# EAGLE board electrosteel2020_10_arrange6_ethernetonl (EAGLE 9.6.2), part 1 of 2
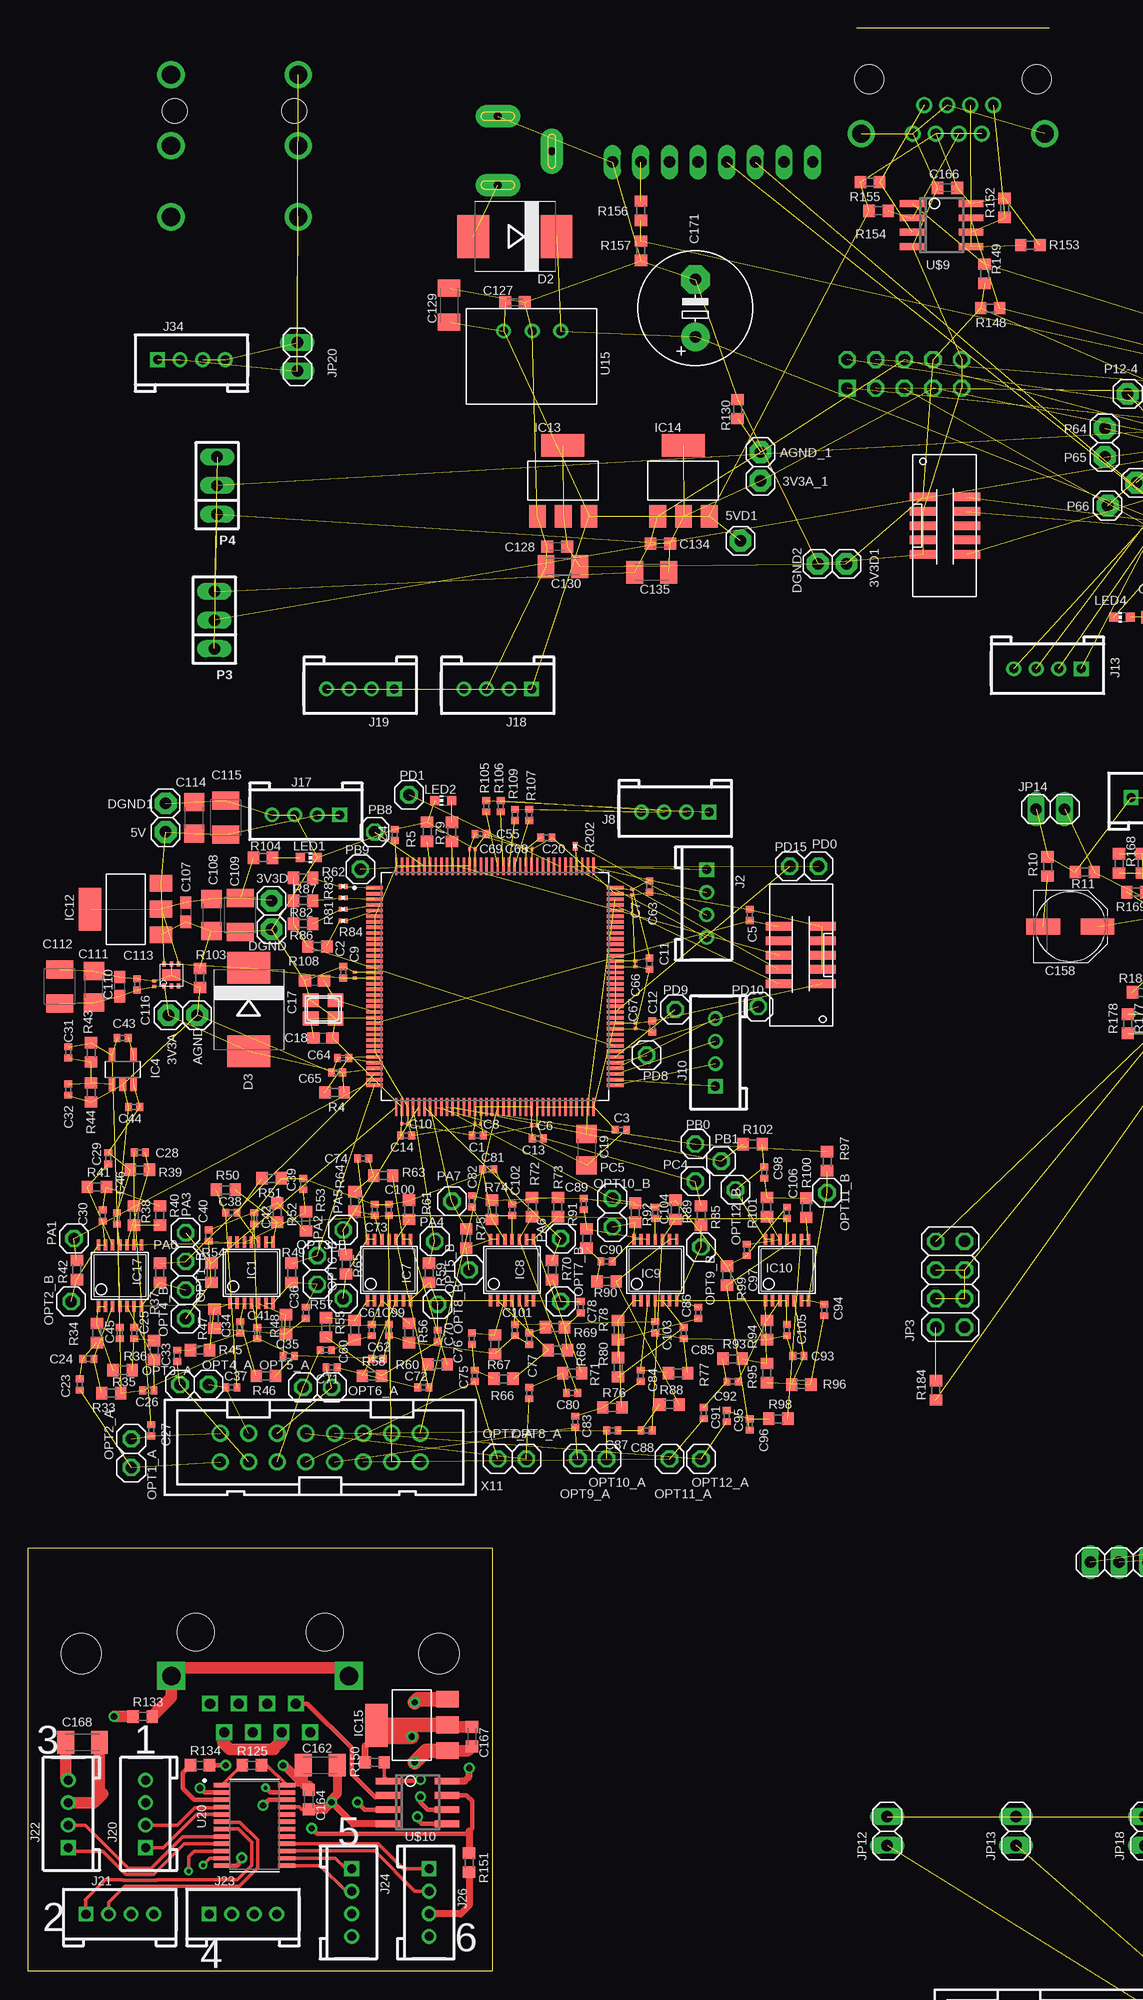
[diagram p0: board, top side]
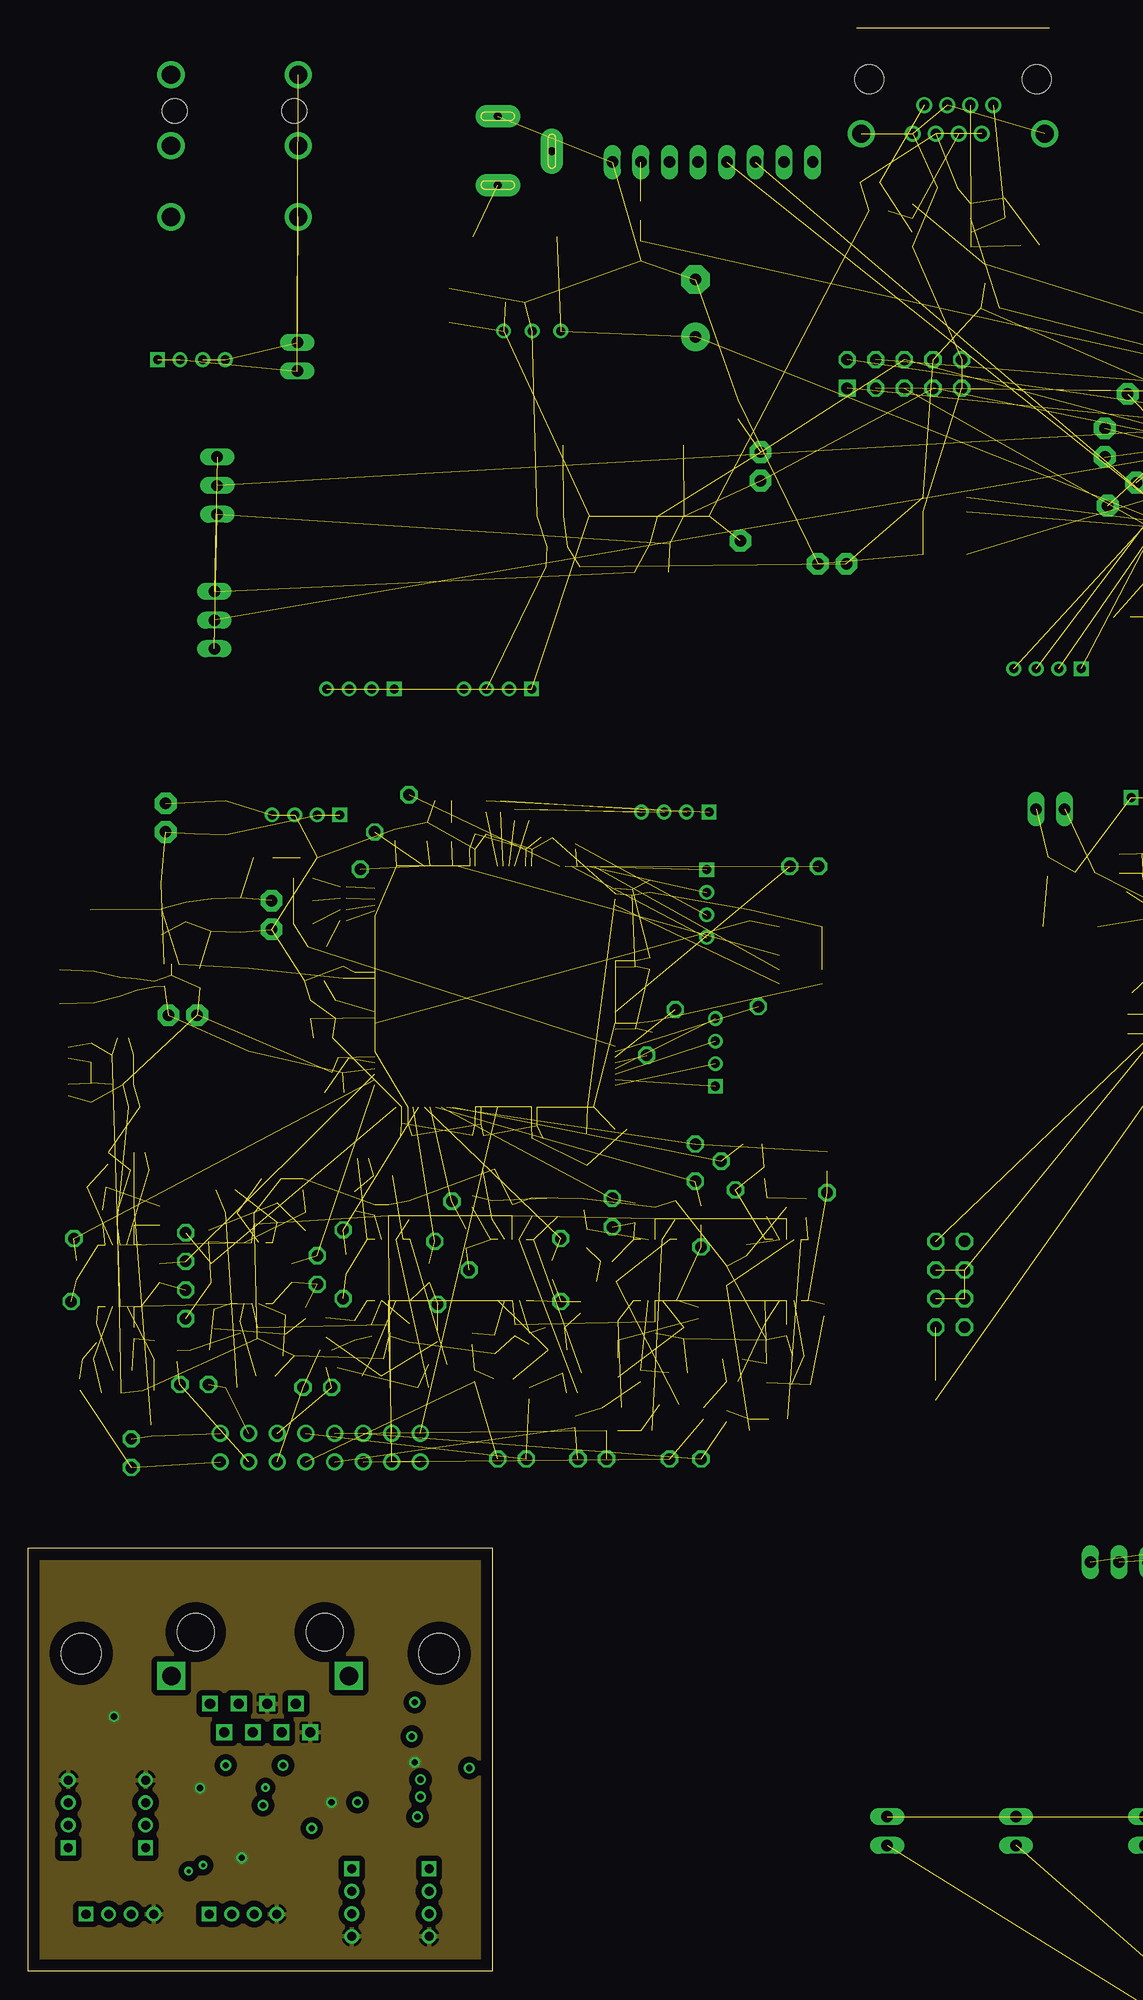
[diagram p1: board, inner layer Route2]
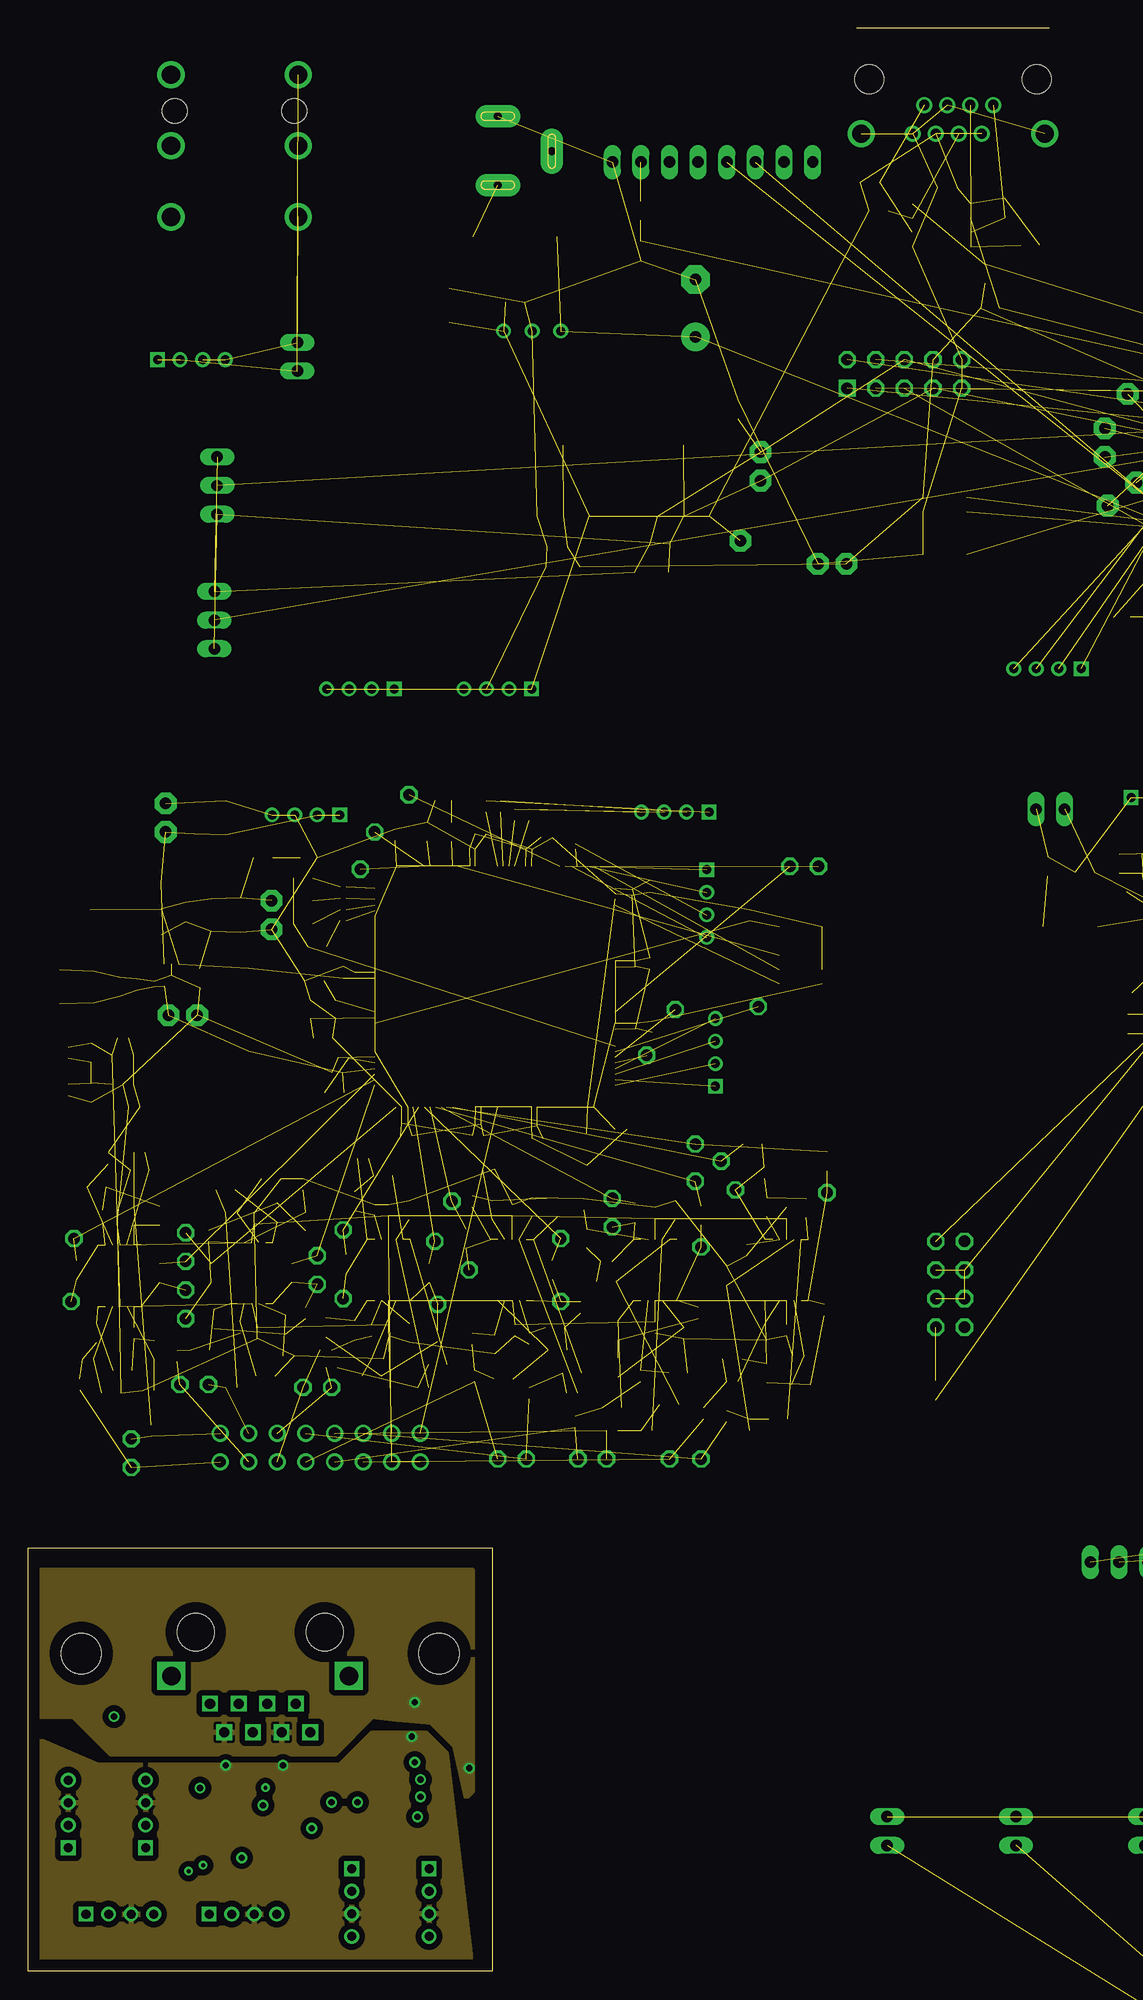
[diagram p2: board, inner layer Route15]
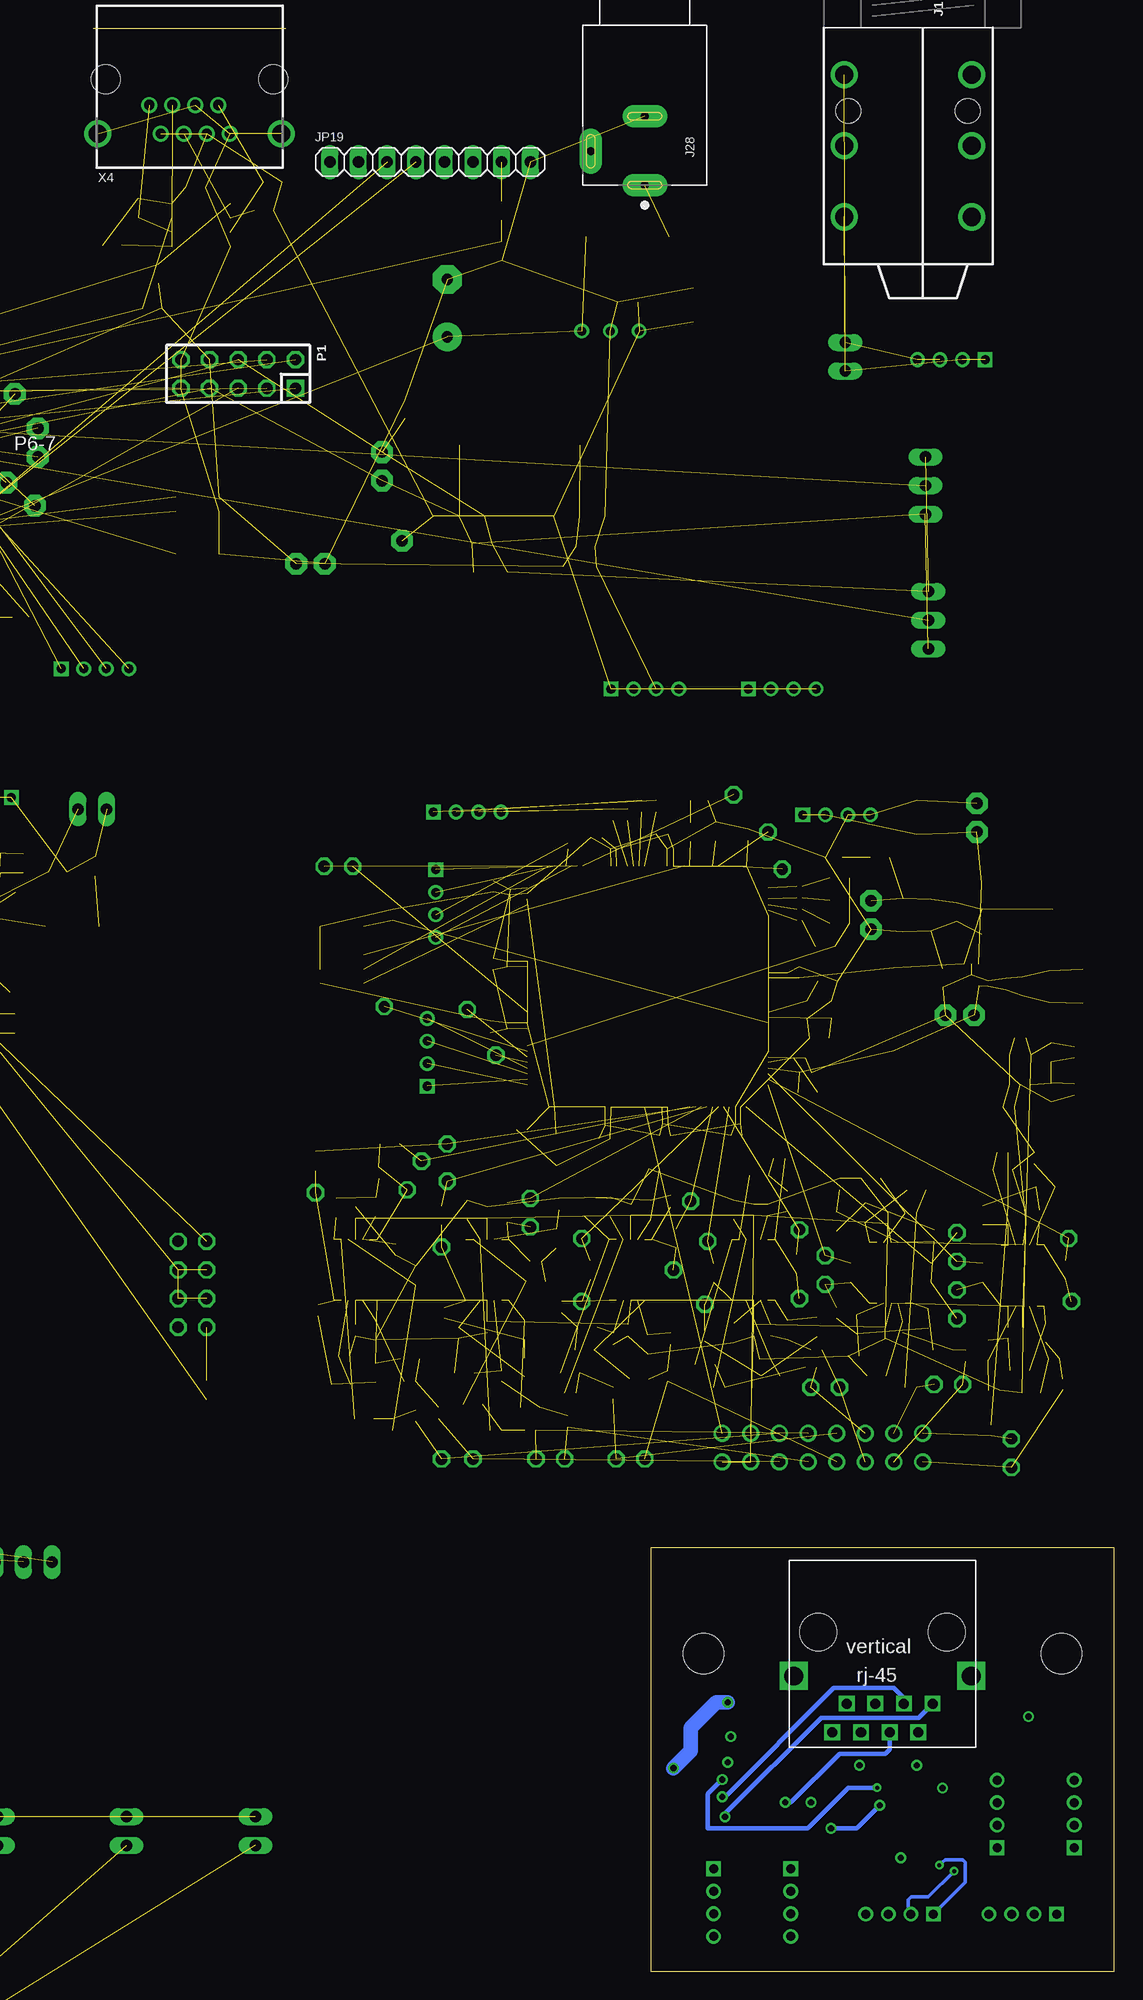
[diagram p3: board, bottom side, seen from below]

Size 41.15 x 37.59 mm. Coordinates in mm from the lower left corner, seen from the top.
Outline: 0,37.59 41.15,37.59 41.15,0 0,0 0,37.59
Copper layers (1+2*15+16): Top 0.035mm / dielectric 0.5mm / Route2 0.035mm / dielectric 0.5mm / Route15 0.035mm / dielectric 0.5mm / Bottom 0.035mm
Design rules "default *": minimum track width 6mil, minimum drill 0.35mm, track to track 9mil, track to pad 9mil, pad to pad 9mil, via to via 9mil, smd to smd 9mil, copper to edge 40mil, drill to drill 6mil, minimum pad ring 10mil, minimum via ring 8mil, stop-mask expansion 4mil, vias tented up to drill 0mil, thermal gap 10mil
Holes 3.56 mm at 4.7,28.19 36.45,28.19
Milling: 4 lines

## Footprints (pad centres in the part's own frame; a part is rotated, then mirrored left to right if it is on the bottom)
1X01 = drill 1.016 pad 1.93 octagon: 1 0,0
1X01' = drill 1.016 octagon: 1 0,0
0402 = smd 0.6 x 0.7: 1 -0.5,0; 2 0.5,0
C0201 = smd 0.25 x 0.35: 1 -0.25,0; 2 0.25,0
C0603 = smd 1.1 x 1: 1 -0.85,0; 2 0.85,0
C1206 = smd 1.6 x 1.8: 1 -1.4,0; 2 1.4,0
SMC_B = smd 1.6 x 2.4: + -1.5,0; - 1.5,0
C0603K = smd 1.05 x 1.08: 1 -0.875,0; 2 0.875,0
C1206K = smd 1.5 x 2: 1 -1.5,0; 2 1.5,0
PANASONIC_D = smd 3 x 1.4: + 2.4,0; - -2.4,0
E5-10,5 = drill 1.016 pad 2.54: + -2.54,0 | drill 1.016 pad 2.54 octagon: - 2.54,0
SMC = smd 2.8 x 3.8: A 3.7,0; C -3.7,0
TSSOP14 = smd 0.305 x 0.991: 1 -1.905,-2.718; 2 -1.27,-2.718; 3 -0.635,-2.718; 4 0,-2.718; 5 0.635,-2.718; 6 1.27,-2.718; 7 1.905,-2.718; 8 1.905,2.718; 9 1.27,2.718; 10 0.635,2.718; 11 0,2.718; 12 -0.635,2.718; 13 -1.27,2.718; 14 -1.905,2.718
SOT23-5 = smd 0.6 x 1.2: 1 -0.95,-1.306; 2 0,-1.306; 3 0.95,-1.306; 4 0.95,1.306; 5 -0.95,1.306
QFP50P2200X2200X160-144N = smd 1.56 x 0.28: 1 -10.68,8.75; 2 -10.68,8.25; 3 -10.68,7.75; 4 -10.68,7.25; 5 -10.68,6.75; 6 -10.68,6.25; 7 -10.68,5.75; 8 -10.68,5.25; 9 -10.68,4.75; 10 -10.68,4.25; 11 -10.68,3.75; 12 -10.68,3.25; 13 -10.68,2.75; 14 -10.68,2.25; 15 -10.68,1.75; 16 -10.68,1.25; 17 -10.68,0.75; 18 -10.68,0.25; 19 -10.68,-0.25; 20 -10.68,-0.75; 21 -10.68,-1.25; 22 -10.68,-1.75; 23 -10.68,-2.25; 24 -10.68,-2.75; 25 -10.68,-3.25; 26 -10.68,-3.75; 27 -10.68,-4.25; 28 -10.68,-4.75; 29 -10.68,-5.25; 30 -10.68,-5.75; 31 -10.68,-6.25; 32 -10.68,-6.75; 33 -10.68,-7.25; 34 -10.68,-7.75; 35 -10.68,-8.25; 36 -10.68,-8.75; 73 10.68,-8.75; 74 10.68,-8.25; 75 10.68,-7.75; 76 10.68,-7.25; 77 10.68,-6.75; 78 10.68,-6.25; 79 10.68,-5.75; 80 10.68,-5.25; 81 10.68,-4.75; 82 10.68,-4.25; 83 10.68,-3.75; 84 10.68,-3.25; 85 10.68,-2.75; 86 10.68,-2.25; 87 10.68,-1.75; 88 10.68,-1.25; 89 10.68,-0.75; 90 10.68,-0.25; 91 10.68,0.25; 92 10.68,0.75; 93 10.68,1.25; 94 10.68,1.75; 95 10.68,2.25; 96 10.68,2.75; 97 10.68,3.25; 98 10.68,3.75; 99 10.68,4.25; 100 10.68,4.75; 101 10.68,5.25; 102 10.68,5.75; 103 10.68,6.25; 104 10.68,6.75; 105 10.68,7.25; 106 10.68,7.75; 107 10.68,8.25; 108 10.68,8.75 | smd 0.28 x 1.56: 37 -8.75,-10.68; 38 -8.25,-10.68; 39 -7.75,-10.68; 40 -7.25,-10.68; 41 -6.75,-10.68; 42 -6.25,-10.68; 43 -5.75,-10.68; 44 -5.25,-10.68; 45 -4.75,-10.68; 46 -4.25,-10.68; 47 -3.75,-10.68; 48 -3.25,-10.68; 49 -2.75,-10.68; 50 -2.25,-10.68; 51 -1.75,-10.68; 52 -1.25,-10.68; 53 -0.75,-10.68; 54 -0.25,-10.68; 55 0.25,-10.68; 56 0.75,-10.68; 57 1.25,-10.68; 58 1.75,-10.68; 59 2.25,-10.68; 60 2.75,-10.68; 61 3.25,-10.68; 62 3.75,-10.68; 63 4.25,-10.68; 64 4.75,-10.68; 65 5.25,-10.68; 66 5.75,-10.68; 67 6.25,-10.68; 68 6.75,-10.68; 69 7.25,-10.68; 70 7.75,-10.68; 71 8.25,-10.68; 72 8.75,-10.68; 109 8.75,10.68; 110 8.25,10.68; 111 7.75,10.68; 112 7.25,10.68; 113 6.75,10.68; 114 6.25,10.68; 115 5.75,10.68; 116 5.25,10.68; 117 4.75,10.68; 118 4.25,10.68; 119 3.75,10.68; 120 3.25,10.68; 121 2.75,10.68; 122 2.25,10.68; 123 1.75,10.68; 124 1.25,10.68; 125 0.75,10.68; 126 0.25,10.68; 127 -0.25,10.68; 128 -0.75,10.68; 129 -1.25,10.68; 130 -1.75,10.68; 131 -2.25,10.68; 132 -2.75,10.68; 133 -3.25,10.68; 134 -3.75,10.68; 135 -4.25,10.68; 136 -4.75,10.68; 137 -5.25,10.68; 138 -5.75,10.68; 139 -6.25,10.68; 140 -6.75,10.68; 141 -7.25,10.68; 142 -7.75,10.68; 143 -8.25,10.68; 144 -8.75,10.68
78LXX = drill 0.813 octagon: GND 0,1.905; IN 1.27,0; OUT -1.27,0
79LXX = drill 0.813 octagon: GND -1.27,0; IN 0,1.905; OUT 1.27,0
6-WSON = smd 0.45 x 0.3: 1 -0.975,0.65; 2 -0.975,0; 3 -0.975,-0.65; 4 0.975,-0.65; 5 0.975,0; 6 0.975,0.65 | smd 0.9 x 1.6: PAD 0,0
SOT223 = smd 1.499 x 2.007: 1 -2.261,-3.15; 2 0.025,-3.15; 3 2.311,-3.15 | smd 3.81 x 2.007: PAD 0,3.15
AUDIO_JACK_0.25"_TRS_PTH_RA = drill 1.6: RING 10.5,-6.95; RING-NORM 10.5,4.35; SLEEVE 4.2,-6.95; SLEEVE-NORM 4.2,4.35; TIP 16.8,-6.95; TIP-NORM 16.8,4.35 | hole 2.2: 7.4,4; 7.4,-6.6
HW4-2.0 = drill 0.8 pad 1.27 square: 1 -3,0 | drill 0.8 pad 1.27: 2 -1,0; 3 1,0; 4 3,0
HW4-2.0-90D = drill 0.8 pad 1.27 square: 1 -3,0 | drill 0.8 pad 1.27: 2 -1,0; 3 1,0; 4 3,0
CUI_PJ-066A = drill 0.7 pad 2 long: 1 0,0; 2 6.1,0; 3 3,4.8
DIL-100-2X10_M = drill 1.016 square: 1 -11.43,1.27 | drill 1.016 octagon: 2 -11.43,-1.27; 3 -8.89,1.27; 4 -8.89,-1.27; 5 -6.35,1.27; 6 -6.35,-1.27; 7 -3.81,1.27; 8 -3.81,-1.27; 9 -1.27,1.27; 10 -1.27,-1.27; 11 1.27,1.27; 12 1.27,-1.27; 13 3.81,1.27; 14 3.81,-1.27; 15 6.35,1.27; 16 6.35,-1.27; 17 8.89,1.27; 18 8.89,-1.27; 19 11.43,1.27; 20 11.43,-1.27
1X04 = drill 1.016 long: 1 -3.81,0; 2 -1.27,0; 3 1.27,0; 4 3.81,0
2X04 = drill 1.016 octagon: 1 -3.81,-1.27; 2 -3.81,1.27; 3 -1.27,-1.27; 4 -1.27,1.27; 5 1.27,-1.27; 6 1.27,1.27; 7 3.81,-1.27; 8 3.81,1.27
2X10 = drill 1.016 octagon: 1 -11.43,-1.27; 2 -11.43,1.27; 3 -8.89,-1.27; 4 -8.89,1.27; 5 -6.35,-1.27; 6 -6.35,1.27; 7 -3.81,-1.27; 8 -3.81,1.27; 9 -1.27,-1.27; 10 -1.27,1.27; 11 1.27,-1.27; 12 1.27,1.27; 13 3.81,-1.27; 14 3.81,1.27; 15 6.35,-1.27; 16 6.35,1.27; 17 8.89,-1.27; 18 8.89,1.27; 19 11.43,-1.27; 20 11.43,1.27
2X15 = drill 1.016 octagon: 1 -17.78,-1.27; 2 -17.78,1.27; 3 -15.24,-1.27; 4 -15.24,1.27; 5 -12.7,-1.27; 6 -12.7,1.27; 7 -10.16,-1.27; 8 -10.16,1.27; 9 -7.62,-1.27; 10 -7.62,1.27; 11 -5.08,-1.27; 12 -5.08,1.27; 13 -2.54,-1.27; 14 -2.54,1.27; 15 0,-1.27; 16 0,1.27; 17 2.54,-1.27; 18 2.54,1.27; 19 5.08,-1.27; 20 5.08,1.27; 21 7.62,-1.27; 22 7.62,1.27; 23 10.16,-1.27; 24 10.16,1.27; 25 12.7,-1.27; 26 12.7,1.27; 27 15.24,-1.27; 28 15.24,1.27; 29 17.78,-1.27; 30 17.78,1.27
1X02 = drill 1.016 long: 1 -1.27,0; 2 1.27,0
1X08 = drill 1.016 long: 1 -8.89,0; 2 -6.35,0; 3 -3.81,0; 4 -1.27,0; 5 1.27,0; 6 3.81,0; 7 6.35,0; 8 8.89,0
CHIP-LED0603 = smd 0.8 x 0.8: A 0,-0.75; C 0,0.75
P-LCC-2 = smd 4 x 4: A 0,2.75; C 0,-2.75
DIL-100-2X05_M = drill 1.016 square: 1 -5.08,1.27 | drill 1.016 octagon: 2 -5.08,-1.27; 3 -2.54,1.27; 4 -2.54,-1.27; 5 0,1.27; 6 0,-1.27; 7 2.54,1.27; 8 2.54,-1.27; 9 5.08,1.27; 10 5.08,-1.27
DIL-100-2X12_M = drill 1.016 square: 1 -13.97,1.27 | drill 1.016 octagon: 2 -13.97,-1.27; 3 -11.43,1.27; 4 -11.43,-1.27; 5 -8.89,1.27; 6 -8.89,-1.27; 7 -6.35,1.27; 8 -6.35,-1.27; 9 -3.81,1.27; 10 -3.81,-1.27; 11 -1.27,1.27; 12 -1.27,-1.27; 13 1.27,1.27; 14 1.27,-1.27; 15 3.81,1.27; 16 3.81,-1.27; 17 6.35,1.27; 18 6.35,-1.27; 19 8.89,1.27; 20 8.89,-1.27; 21 11.43,1.27; 22 11.43,-1.27; 23 13.97,1.27; 24 13.97,-1.27
SIP-100-03-40Y = drill 1.016 long: 1 -2.54,0; 2 0,0; 3 2.54,0
NX3225 = smd 1.4 x 1.2: 1 -1.1,-0.8; 2 1.1,-0.8; 3 1.1,0.8; 4 -1.1,0.8
RESC1608X60 = smd 0.799 x 0.974: 1 -0.815,0; 2 0.815,0
R0603 = smd 1 x 1.1: 1 -0.85,0; 2 0.85,0
R0201 = smd 0.28 x 0.43: 1 -0.255,0; 2 0.255,0
TACTILE_SWITCH_PTH_6.0MM = drill 1.016 pad 1.88: 1 -3.251,2.261; 2 3.251,2.261; 3 -3.251,-2.261; 4 3.251,-2.261
PEC11R-4215F-S0024 = drill 1 square: 1 -2.5,7 | drill 1: 2 2.5,7; A -2.5,-7.5; B 2.5,-7.5; C 0,-7.5 | drill 1.8 long: P1 -5.7,0; P2 5.7,0
TQFP-100-14X14MM = smd 1.5 x 0.27: 1 -8,6; 2 -8,5.5; 3 -8,5; 4 -8,4.5; 5 -8,4; 6 -8,3.5; 7 -8,3; 8 -8,2.5; 9 -8,2; 10 -8,1.5; 11 -8,1; 12 -8,0.5; 13 -8,0; 14 -8,-0.5; 15 -8,-1; 16 -8,-1.5; 17 -8,-2; 18 -8,-2.5; 19 -8,-3; 20 -8,-3.5; 21 -8,-4; 22 -8,-4.5; 23 -8,-5; 24 -8,-5.5; 25 -8,-6; 51 8,-6; 52 8,-5.5; 53 8,-5; 54 8,-4.5; 55 8,-4; 56 8,-3.5; 57 8,-3; 58 8,-2.5; 59 8,-2; 60 8,-1.5; 61 8,-1; 62 8,-0.5; 63 8,0; 64 8,0.5; 65 8,1; 66 8,1.5; 67 8,2; 68 8,2.5; 69 8,3; 70 8,3.5; 71 8,4; 72 8,4.5; 73 8,5; 74 8,5.5; 75 8,6 | smd 0.27 x 1.5: 26 -6,-8; 27 -5.5,-8; 28 -5,-8; 29 -4.5,-8; 30 -4,-8; 31 -3.5,-8; 32 -3,-8; 33 -2.5,-8; 34 -2,-8; 35 -1.5,-8; 36 -1,-8; 37 -0.5,-8; 38 0,-8; 39 0.5,-8; 40 1,-8; 41 1.5,-8; 42 2,-8; 43 2.5,-8; 44 3,-8; 45 3.5,-8; 46 4,-8; 47 4.5,-8; 48 5,-8; 49 5.5,-8; 50 6,-8; 76 6,8; 77 5.5,8; 78 5,8; 79 4.5,8; 80 4,8; 81 3.5,8; 82 3,8; 83 2.5,8; 84 2,8; 85 1.5,8; 86 1,8; 87 0.5,8; 88 0,8; 89 -0.5,8; 90 -1,8; 91 -1.5,8; 92 -2,8; 93 -2.5,8; 94 -3,8; 95 -3.5,8; 96 -4,8; 97 -4.5,8; 98 -5,8; 99 -5.5,8; 100 -6,8
QRE1113 = smd 1.2 x 0.6: 1 -1.8,-0.9; 2 1.8,-0.9; 3 1.8,0.9; 4 -1.8,0.9
DC-DC_CONVERTER_78XX = drill 0.8: GND 0,0; VIN -2.54,0; VOUT 2.54,0
TEXAS_SOT23-5 = smd 0.55 x 1.2: 1 -0.95,-1.3; 2 0,-1.3; 3 0.95,-1.3; 4 0.95,1.3; 5 -0.95,1.3
SOP65P640X120-24N = smd 1.57 x 0.41: 1 -2.87,3.575; 2 -2.87,2.925; 3 -2.87,2.275; 4 -2.87,1.625; 5 -2.87,0.975; 6 -2.87,0.325; 7 -2.87,-0.325; 8 -2.87,-0.975; 9 -2.87,-1.625; 10 -2.87,-2.275; 11 -2.87,-2.925; 12 -2.87,-3.575; 13 2.87,-3.575; 14 2.87,-2.925; 15 2.87,-2.275; 16 2.87,-1.625; 17 2.87,-0.975; 18 2.87,-0.325; 19 2.87,0.325; 20 2.87,0.975; 21 2.87,1.625; 22 2.87,2.275; 23 2.87,2.925; 24 2.87,3.575
SOIC8-1.27-5X4MM = smd 0.6 x 1.4: 1 -1.905,-2.7; 2 -0.635,-2.7; 3 0.635,-2.7; 4 1.905,-2.7; 5 1.905,2.7; 6 0.635,2.7; 7 -0.635,2.7; 8 -1.905,2.7
RK09 = drill 1.2 square: 1-09 -2.5,-7.5; 2-09 0,-7.5; 3-09 2.5,-7.5 | drill 1.854 square: MOUNT1 -4.683,0; MOUNT2 4.683,0
CMR0512S3C = drill 0.8 square: P$1 -7.62,0; P$2 -5.08,0; P$3 0,0; P$4 2.54,0; P$5 5.08,0
SOT23-5L = smd 0.55 x 1.2: 1 -0.95,-1.3; 2 0,-1.3; 3 0.95,-1.3; 4 0.95,1.3; 5 -0.95,1.3
SS-7188VS-A-FLS_RJ45 = drill 0.889 square: P$1 -4.445,4.445; P$2 -3.175,6.985; P$3 -1.905,4.445; P$4 -0.635,6.985; P$5 0.635,4.445; P$6 1.905,6.985; P$7 3.175,4.445; P$8 4.445,6.985 | drill 1.651 square: P$9 -7.874,1.981; P$10 7.874,1.981 | hole 3.277: -5.715,-1.905; 5.715,-1.905
SO8 = smd 0.6 x 2.2: 1 -1.905,-2.6; 2 -0.635,-2.6; 3 0.635,-2.6; 4 1.905,-2.6; 5 1.905,2.6; 6 0.635,2.6; 7 -0.635,2.6; 8 -1.905,2.6
3221-10-0300-00 = smd 0.76 x 2.4: 1 -2.54,-1.87; 2 -2.54,1.97; 3 -1.27,-1.87; 4 -1.27,1.97; 5 0,-1.87; 6 0,1.97; 7 1.27,-1.87; 8 1.27,1.97; 9 2.54,-1.87; 10 2.54,1.97
GLX-S-88M = drill 0.9 pad 1.422: 1 -3.57,-2.3; 2 -2.55,-4.84; 3 -1.53,-2.3; 4 -0.51,-4.84; 5 0.51,-2.3; 6 1.53,-4.84; 7 2.55,-2.3; 8 3.57,-4.84 | drill 1.6 pad 2.184: S1 -8.125,-4.84; S2 8.125,-4.84 | hole 2.55: -7.44,0; 7.44,0
PAK100/2500-24 = drill 1 pad 1.422: 1 -13.97,-1.27; 2 -13.97,1.27; 3 -11.43,-1.27; 4 -11.43,1.27; 5 -8.89,-1.27; 6 -8.89,1.27; 7 -6.35,-1.27; 8 -6.35,1.27; 9 -3.81,-1.27; 10 -3.81,1.27; 11 -1.27,-1.27; 12 -1.27,1.27; 13 1.27,-1.27; 14 1.27,1.27; 15 3.81,-1.27; 16 3.81,1.27; 17 6.35,-1.27; 18 6.35,1.27; 19 8.89,-1.27; 20 8.89,1.27; 21 11.43,-1.27; 22 11.43,1.27; 23 13.97,-1.27; 24 13.97,1.27
PAK100/2500-20 = drill 1 pad 1.422: 1 -11.43,-1.27; 2 -11.43,1.27; 3 -8.89,-1.27; 4 -8.89,1.27; 5 -6.35,-1.27; 6 -6.35,1.27; 7 -3.81,-1.27; 8 -3.81,1.27; 9 -1.27,-1.27; 10 -1.27,1.27; 11 1.27,-1.27; 12 1.27,1.27; 13 3.81,-1.27; 14 3.81,1.27; 15 6.35,-1.27; 16 6.35,1.27; 17 8.89,-1.27; 18 8.89,1.27; 19 11.43,-1.27; 20 11.43,1.27
PAK100/2500-16 = drill 1 pad 1.422: 1 -8.89,-1.27; 2 -8.89,1.27; 3 -6.35,-1.27; 4 -6.35,1.27; 5 -3.81,-1.27; 6 -3.81,1.27; 7 -1.27,-1.27; 8 -1.27,1.27; 9 1.27,-1.27; 10 1.27,1.27; 11 3.81,-1.27; 12 3.81,1.27; 13 6.35,-1.27; 14 6.35,1.27; 15 8.89,-1.27; 16 8.89,1.27
PAK100/2500-10 = drill 1 pad 1.422: 1 -5.08,-1.27; 2 -5.08,1.27; 3 -2.54,-1.27; 4 -2.54,1.27; 5 0,-1.27; 6 0,1.27; 7 2.54,-1.27; 8 2.54,1.27; 9 5.08,-1.27; 10 5.08,1.27

## Placement (x,y rotation side)
3V3A  [1X01]  12.45,84.84 0 top  (outside the outline)
3V3A_0A  PINHD-1X1  [1X01']  199.64,43.43 0 top  (outside the outline)
3V3A_0B  PINHD-1X1  [1X01']  236.22,105.16 0 top  (outside the outline)
3V3A_0C  PINHD-1X1  [1X01']  118.62,43.18 0 top  (outside the outline)
3V3A_1  [1X01]  64.96,132.26 0 top  (outside the outline)
3V3A_2  [1X01]  215.39,3.81 0 top  (outside the outline)
3V3D  [1X01]  21.59,95 0 top  (outside the outline)
3V3D1  [1X01]  72.58,124.89 0 top  (outside the outline)
3V3D2  [1X01]  189.74,3.3 180 top  (outside the outline)
5V  [1X01]  12.19,101.09 0 top  (outside the outline)
5V/1  PINHD-1X1  [1X01']  143.51,93.22 0 top  (outside the outline)
5VD1  [1X01]  63.19,126.92 0 top  (outside the outline)
5VD2  [1X01]  177.8,12.95 0 top  (outside the outline)
+12VA  PINHD-1X1  [1X01']  107.44,93.47 0 top  (outside the outline)
+15VA  PINHD-1X1  [1X01']  116.59,102.11 0 top  (outside the outline)
-12VA  PINHD-1X1  [1X01']  113.03,91.95 0 top  (outside the outline)
-15VA  PINHD-1X1  [1X01']  116.59,99.57 0 top  (outside the outline)
AGND  [1X01]  14.99,84.84 0 top  (outside the outline)
AGND_1  [1X01]  64.96,134.8 0 top  (outside the outline)
AGND_2  [1X01]  212.85,3.81 0 top  (outside the outline)
C1  .1uf  [0402]  39.88,74.17 180 top  (outside the outline)
C2  .1uf  [0402]  27.94,88.65 90 top  (outside the outline)
C3  .1uf  [0402]  52.58,74.68 0 top  (outside the outline)
C4  .1uf  [0402]  32.51,100.84 90 top  (outside the outline)
C5  .1uf  [0402]  64.01,93.73 90 top  (outside the outline)
C6  .01uf  [C0201]  44.91,75.06 180 top  (outside the outline)
C7  .01uf  [C0201]  53.59,95.76 270 top  (outside the outline)
C8  .01uf  [C0201]  39.88,75.18 180 top  (outside the outline)
C9  .01uf  [C0201]  28.96,88.39 90 top  (outside the outline)
C10  .01uf  [C0201]  33.4,75.21 180 top  (outside the outline)
C11  .1uf  [0402]  55.12,89.41 270 top  (outside the outline)
C12  .1uf  [0402]  55.37,83.82 270 top  (outside the outline)
C13  .1uf  [0402]  45.21,73.91 180 top  (outside the outline)
C14  .1uf  [0402]  33.53,74.17 180 top  (outside the outline)
C15  .1uf  [0402]  105.66,169.42 270 top  (outside the outline)
C16  .01uf  [0402]  107.19,169.42 270 top  (outside the outline)
C17  18pf  [C0603]  25.4,87.88 180 top  (outside the outline)
C18  18pf  [C0603]  26.16,82.8 0 top  (outside the outline)
C19  2.2uf  [C1206]  49.53,72.9 270 top  (outside the outline)
C20  .1uf  [0402]  45.97,100.58 0 top  (outside the outline)
C21  .01uf  [0402]  114.55,168.91 0 top  (outside the outline)
C22  .1uf  [0402]  114.55,170.18 0 top  (outside the outline)
C23  .1uf  [0402]  4.57,52.07 270 top  (outside the outline)
C24  .1uf  [0402]  5.33,54.36 180 top  (outside the outline)
C25  .1uf  [0402]  9.4,56.64 90 top  (outside the outline)
C26  .1uf  [0402]  10.67,51.56 180 top  (outside the outline)
C27  .1uf  [0402]  10.92,48.01 270 top  (outside the outline)
C28  .1uf  [0402]  9.91,72.64 180 top  (outside the outline)
C29  .1uf  [0402]  7.11,72.14 90 top  (outside the outline)
C30  .1uf  [0402]  6.6,67.06 270 top  (outside the outline)
C31  .1uf  [0402]  3.56,81.53 270 top  (outside the outline)
C32  .1uf  [0402]  3.56,78.23 270 top  (outside the outline)
C33  .1uf  [0402]  13.21,54.61 270 top  (outside the outline)
C34  .1uf  [0402]  18.8,57.15 270 top  (outside the outline)
C35  .1uf  [0402]  23.11,54.61 0 top  (outside the outline)
C36  .1uf  [0402]  24.64,58.42 90 top  (outside the outline)
C37  .1uf  [0402]  18.03,51.82 180 top  (outside the outline)
C38  .1uf  [0402]  18.03,67.31 180 top  (outside the outline)
C39  .1uf  [0402]  24.38,69.85 90 top  (outside the outline)
C40  .1uf  [0402]  16,65.28 270 top  (outside the outline)
C41  .1uf  [0402]  20.32,56.64 270 top  (outside the outline)
C42  .1uf  [0402]  20.07,66.8 270 top  (outside the outline)
C43  .1uf  [0402]  8.38,82.8 0 top  (outside the outline)
C44  .1uf  [0402]  9.4,76.71 180 top  (outside the outline)
C45  .1uf  [0402]  8.13,56.64 270 top  (outside the outline)
C46  .1uf  [0402]  7.87,66.8 270 top  (outside the outline)
C47  .1uf  [0402]  107.44,103.38 90 top  (outside the outline)
C48  .1uf  [0402]  112.52,94.23 0 top  (outside the outline)
C49  .1uf  [0402]  130.05,102.87 180 top  (outside the outline)
C50  .1uf  [0402]  133.1,102.87 180 top  (outside the outline)
C51  .01uf  [C0201]  108.46,103.38 90 top  (outside the outline)
C52  .01uf  [C0201]  112.52,95.25 0 top  (outside the outline)
C53  .01uf  [C0201]  132.59,101.85 180 top  (outside the outline)
C54  .01uf  [C0201]  130.3,101.85 180 top  (outside the outline)
C55  .1uf  [0402]  40.13,100.9 0 top  (outside the outline)
C56  .1uf  [0402]  101.6,97.03 0 top  (outside the outline)
C57  .1uf  [0402]  102.11,86.11 180 top  (outside the outline)
C58  .01uf  [C0201]  102.11,95.5 0 top  (outside the outline)
C59  .01uf  [C0201]  102.11,87.63 180 top  (outside the outline)
C60  .1uf  [0402]  26.42,55.12 180 top  (outside the outline)
C61  .1uf  [0402]  30.48,56.9 270 top  (outside the outline)
C62  .1uf  [0402]  30.99,54.36 0 top  (outside the outline)
C63  .1uf  [0402]  55.12,96.27 270 top  (outside the outline)
C64  .01uf  [0402]  27.94,81.03 180 top  (outside the outline)
C65  .01uf  [0402]  27.41,79.76 180 top  (outside the outline)
C66  .01uf  [C0201]  53.85,89.41 270 top  (outside the outline)
C67  .01uf  [C0201]  53.87,83.9 270 top  (outside the outline)
C68  .01uf  [C0201]  44.45,99.57 0 top  (outside the outline)
C69  .01uf  [C0201]  39.4,99.57 0 top  (outside the outline)
C70  .1uf  [0402]  36.32,56.39 90 top  (outside the outline)
C71  .1uf  [0402]  26.92,53.59 180 top  (outside the outline)
C72  .1uf  [0402]  35.05,51.82 180 top  (outside the outline)
C73  .1uf  [0402]  30.73,67.56 90 top  (outside the outline)
C74  .1uf  [0402]  29.72,72.14 180 top  (outside the outline)
C75  .1uf  [0402]  39.62,52.83 270 top  (outside the outline)
C76  .1uf  [0402]  39.37,56.13 270 top  (outside the outline)
C77  .1uf  [0402]  44.45,56.13 270 top  (outside the outline)
C78  .1uf  [0402]  49.02,58.93 90 top  (outside the outline)
C79  .1uf  [0402]  44.45,51.31 270 top  (outside the outline)
C80  .1uf  [0402]  48.26,51.31 180 top  (outside the outline)
C81  .1uf  [0402]  40.82,71.18 0 top  (outside the outline)
C82  .1uf  [0402]  39.37,68.33 270 top  (outside the outline)
C83  .1uf  [0402]  48.51,48.77 270 top  (outside the outline)
C84  .1uf  [0402]  54.36,52.83 270 top  (outside the outline)
C85  .1uf  [0402]  58.17,56.64 270 top  (outside the outline)
C86  .1uf  [0402]  59.44,58.42 90 top  (outside the outline)
C87  .1uf  [0402]  51.82,48.01 180 top  (outside the outline)
C88  .1uf  [0402]  54.86,48.01 180 top  (outside the outline)
C89  .1uf  [0402]  49.28,68.07 90 top  (outside the outline)
C90  .1uf  [0402]  51.31,62.99 0 top  (outside the outline)
C91  .1uf  [0402]  59.94,49.53 270 top  (outside the outline)
C92  .1uf  [0402]  62.48,52.32 180 top  (outside the outline)
C93  .1uf  [0402]  68.33,54.61 180 top  (outside the outline)
C94  .1uf  [0402]  70.61,58.67 90 top  (outside the outline)
C95  .1uf  [0402]  61.98,49.28 270 top  (outside the outline)
C96  .1uf  [0402]  64.01,48.51 90 top  (outside the outline)
C97  .1uf  [0402]  63.75,64.01 270 top  (outside the outline)
C98  .1uf  [0402]  65.28,70.87 90 top  (outside the outline)
C99  .1uf  [0402]  32,56.9 270 top  (outside the outline)
C100  .1uf  [0402]  32,67.56 270 top  (outside the outline)
C101  .1uf  [0402]  43.18,56.9 270 top  (outside the outline)
C102  .1uf  [0402]  42.93,67.56 270 top  (outside the outline)
C103  .1uf  [0402]  55.63,57.15 270 top  (outside the outline)
C104  .1uf  [0402]  55.63,67.31 270 top  (outside the outline)
C105  .1uf  [0402]  67.31,56.9 270 top  (outside the outline)
C106  .1uf  [0402]  67.31,67.31 270 top  (outside the outline)
C107  .1uf  [C0603]  13.97,93.98 270 top  (outside the outline)
C108  1uf  [C1206]  16.26,93.73 270 top  (outside the outline)
C109  10uf  [SMC_B]  18.8,93.73 270 top  (outside the outline)
C110  .1uf  [C0603]  8.13,87.38 90 top  (outside the outline)
C111  1uf  [C1206]  5.84,87.38 90 top  (outside the outline)
C112  10uf  [SMC_B]  2.79,87.38 90 top  (outside the outline)
C113  .1uf  [0402]  9.65,87.57 90 top  (outside the outline)
C114  1uf  [C1206]  14.73,102.36 90 top  (outside the outline)
C115  10uf  [SMC_B]  17.53,102.36 90 top  (outside the outline)
C116  .01uf  [C0201]  11.18,87.63 90 top  (outside the outline)
C117  .1uf  [0402]  167.13,98.3 270 top  (outside the outline)
C118  .1uf  [0402]  167.13,93.22 90 top  (outside the outline)
C119  .01uf  [C0201]  165.86,98.3 270 top  (outside the outline)
C120  .01uf  [C0201]  165.89,93.27 90 top  (outside the outline)
C121  .01uf  [C0201]  121.92,101.85 0 top  (outside the outline)
C122  .1uf  [0402]  121.92,102.87 0 top  (outside the outline)
C123  2.2uf  [C1206]  121.41,168.91 0 top  (outside the outline)
C124  .1uf  [C0603K]  228.35,4.32 180 top  (outside the outline)
C125  1uf  [C1206K]  229.11,2.03 180 top  (outside the outline)
C126  1uf  [C1206K]  224.03,2.03 0 top  (outside the outline)
C127  .1uf  [C0603K]  43.18,148.08 0 top  (outside the outline)
C128  .1uf  [C0603K]  46.93,126.42 180 top  (outside the outline)
C129  10uf  [C1206K]  37.34,147.83 90 top  (outside the outline)
C130  10uf  [C1206K]  47.44,124.64 180 top  (outside the outline)
C131  1uf  [C1206K]  214.88,13.21 180 top  (outside the outline)
C132  1uf  [C1206K]  238.51,12.95 0 top  (outside the outline)
C133  .1uf  [C0603K]  235.8,7.2 0 top  (outside the outline)
C134  .1uf  [C0603K]  56.07,126.67 180 top  (outside the outline)
C135  10uf  [C1206K]  55.31,124.13 180 top  (outside the outline)
C136  .1uf  [C0603K]  120.4,133.6 0 top  (outside the outline)
C137  1uf  [C1206K]  122.17,135.64 0 top  (outside the outline)
C138  1uf  [C1206K]  120.4,130.3 0 top  (outside the outline)
C139  1uf  [C1206K]  110.24,143.51 90 top  (outside the outline)
C140  1uf  [C1206K]  111.25,117.35 270 top  (outside the outline)
C141  .1uf  [C0603K]  116.84,123.7 0 top  (outside the outline)
C142  .1uf  [C0603K]  108.2,142.75 90 top  (outside the outline)
C143  .1uf  [C0603K]  100.58,140.21 180 top  (outside the outline)
C144  .1uf  [C0603K]  117.09,140.21 90 top  (outside the outline)
C145  .1uf  [C0603K]  100.33,123.7 180 top  (outside the outline)
C146  .1uf  [C0603K]  108.71,121.16 270 top  (outside the outline)
C147  .1uf  [C0603K]  212.04,213.36 270 top  (outside the outline)
C148  .1uf  [C0603K]  217.41,22.12 180 top  (outside the outline)
C149  .1uf  [C0603K]  217.68,7.62 180 top  (outside the outline)
C150  .1uf  [C0603K]  235.71,22.61 0 top  (outside the outline)
C151  .1uf  [C0603K]  214.88,16 180 top  (outside the outline)
C152  .1uf  [C0603K]  207.01,4.32 270 top  (outside the outline)
C153  10uf  [C1206K]  209.3,4.32 270 top  (outside the outline)
C154  .1uf  [C0603K]  237.72,15.44 0 top  (outside the outline)
C155  2200pf  [C0603K]  237.49,18.03 0 top  (outside the outline)
C156  .1uf  [C0603K]  170.18,12.19 270 top  (outside the outline)
C157  .1uf  [C0603K]  186.69,11.68 0 top  (outside the outline)
C158  22uf  [PANASONIC_D]  92.46,92.71 0 top  (outside the outline)
C159  1uf  [C1206K]  220.42,213.36 270 top  (outside the outline)
C160  10uf  [C1206K]  173.23,11.68 270 top  (outside the outline)
C161  10uf  [C1206K]  186.69,13.97 0 top  (outside the outline)
C162  1uf  [C1206K]  25.91,18.29 0 top
C163  1uf  [C1206K]  214.88,10.67 180 top  (outside the outline)
C164  .1uf  [C0603K]  24.89,15.24 270 top
C165  .1uf  [C0603K]  138.94,127.76 0 top  (outside the outline)
C166  .1uf  [C0603K]  81.53,158.24 180 top  (outside the outline)
C167  .1uf  [C0603K]  39.37,20.83 270 top
C168  10uf  [C1206K]  4.83,20.32 180 top
C169  1uf  [C1206K]  138.94,125.73 0 top  (outside the outline)
C170  1uf  [C1206K]  117.09,143.26 0 top  (outside the outline)
C171  220uf  [E5-10,5]  59.18,147.57 90 top  (outside the outline)
C172  .1uf  [C0603K]  230.58,213.61 270 top  (outside the outline)
C173  1uf  [C1206K]  238.96,213.61 270 top  (outside the outline)
C174  10uf  [SMC_B]  243.08,69.09 270 top  (outside the outline)
C175  1uf  [C1206]  251.46,69.34 90 top  (outside the outline)
C176  .1uf  [C0603K]  211.79,188.98 270 top  (outside the outline)
C177  1uf  [C1206K]  220.17,188.98 270 top  (outside the outline)
C178  .1uf  [C0603]  247.9,73.66 270 top  (outside the outline)
C179  .1uf  [C0603]  244.09,65.53 0 top  (outside the outline)
C180  .1uf  [C0603K]  231.09,188.98 270 top  (outside the outline)
C181  1uf  [C1206K]  239.47,188.98 270 top  (outside the outline)
C182  2.2uf  [C1206]  107.95,164.85 270 top  (outside the outline)
C184  .1uf  [C0603K]  20.12,210.82 90 top  (outside the outline)
C185  1uf  [C1206K]  11.73,207.77 90 top  (outside the outline)
C188  .1uf  [C0603K]  260.15,185.67 90 top  (outside the outline)
C189  1uf  [C1206K]  251.26,182.88 90 top  (outside the outline)
C192  .1uf  [C0603K]  229.87,167.59 0 top  (outside the outline)
C193  1uf  [C1206K]  227.08,175.97 0 top  (outside the outline)
C196  .1uf  [C0603K]  248.62,213.61 270 top  (outside the outline)
C197  1uf  [C1206K]  257,213.61 270 top  (outside the outline)
C200  .1uf  [C0603K]  257.51,6.1 270 top  (outside the outline)
C201  1uf  [C1206K]  266.14,9.14 270 top  (outside the outline)
C204  .1uf  [C0603K]  259.33,34.24 0 top  (outside the outline)
C205  1uf  [C1206K]  256.29,42.62 0 top  (outside the outline)
D2  MBRS340T3  [SMC]  43.18,153.92 180 top  (outside the outline)
D3  MBRS340T3  [SMC]  19.56,85.34 270 top  (outside the outline)
DGND  [1X01]  21.59,92.46 180 top  (outside the outline)
DGND1  [1X01]  12.19,103.63 0 top  (outside the outline)
DGND2  [1X01]  70.04,124.89 0 top  (outside the outline)
DGND3  [1X01]  177.8,10.41 0 top  (outside the outline)
DGND4  [1X01]  105.41,163.58 0 top  (outside the outline)
DGND5  PINHD-1X1  [1X01']  143.51,90.68 180 top  (outside the outline)
HOUT1  [1X01]  214.58,212.34 0 top  (outside the outline)
HOUT3  [1X01]  233.12,212.6 0 top  (outside the outline)
HOUT5  [1X01]  214.33,187.96 0 top  (outside the outline)
HOUT7  [1X01]  233.63,187.96 0 top  (outside the outline)
HOUT9  [1X01]  17.58,211.84 180 top  (outside the outline)
HOUT11  [1X01]  257.61,186.69 180 top  (outside the outline)
HOUT13  [1X01]  230.89,170.13 90 top  (outside the outline)
HOUT15  [1X01]  251.16,212.6 0 top  (outside the outline)
HOUT17  [1X01]  260.05,5.08 0 top  (outside the outline)
HOUT19  [1X01]  260.35,36.78 90 top  (outside the outline)
IC1  OPA4344E  [TSSOP14]  19.81,61.98 0 top  (outside the outline)
IC2  LMV321M5  [SOT23-5]  248.41,69.6 180 top  (outside the outline)
IC3  STM32H743ZIT6  [QFP50P2200X2200X160-144N]  41.4,87.38 0 top  (outside the outline)
IC4  LMV321M5  [SOT23-5]  8.38,80.01 0 top  (outside the outline)
IC5  [78LXX]  111.76,102.11 0 top  (outside the outline)
IC6  [79LXX]  112.52,97.54 0 top  (outside the outline)
IC7  OPA4344E  [TSSOP14]  32,62.23 0 top  (outside the outline)
IC8  OPA4344E  [TSSOP14]  42.93,62.23 0 top  (outside the outline)
IC9  OPA4344E  [TSSOP14]  55.63,62.23 0 top  (outside the outline)
IC10  OPA4344E  [TSSOP14]  67.31,62.23 0 top  (outside the outline)
IC11  LP5912  [6-WSON]  12.7,88.39 90 top  (outside the outline)
IC12  REG1117  [SOT223]  8.64,94.23 90 top  (outside the outline)
IC13  REG1117  [SOT223]  47.44,132.26 0 top  (outside the outline)
IC14  REG1117  [SOT223]  58.11,132.26 0 top  (outside the outline)
IC15  REG1117  [SOT223]  34.04,21.84 90 top
IC16  OPA4344E  [TSSOP14]  101.85,91.44 180 top  (outside the outline)
IC17  OPA4344E  [TSSOP14]  8.13,61.72 0 top  (outside the outline)
IC18  REG1117  [SOT223]  201.68,5.33 90 top  (outside the outline)
IC20  REG1117  [SOT223]  185.67,6.35 180 top  (outside the outline)
J1  AUDIO_JACK_TRS_0.25"_PTH_RA  [AUDIO_JACK_0.25"_TRS_PTH_RA]  17.02,172.47 270 bottom  (outside the outline)
J2  4P-2.0  [HW4-2.0]  60.2,94.74 270 top  (outside the outline)
J3  4P-2.0  [HW4-2.0]  151.13,129.54 270 top  (outside the outline)
J4  4P-2.0  [HW4-2.0]  157.99,129.54 270 top  (outside the outline)
J5  4P-2.0  [HW4-2.0]  164.85,129.54 270 top  (outside the outline)
J6  4P-2.0  [HW4-2.0]  171.7,129.54 270 top  (outside the outline)
J7  4P-2.0  [HW4-2.0]  178.56,129.54 270 top  (outside the outline)
J8  4P-2.0  [HW4-2.0]  57.4,102.87 180 top  (outside the outline)
J9  4P-2.0-90D  [HW4-2.0-90D]  236.42,218.95 270 bottom  (outside the outline)
J10  4P-2.0  [HW4-2.0]  60.96,81.53 90 top  (outside the outline)
J11  4P-2.0  [HW4-2.0]  198.63,21.59 180 top  (outside the outline)
J12  4P-2.0  [HW4-2.0]  210.57,21.59 180 top  (outside the outline)
J13  4P-2.0  [HW4-2.0]  90.42,115.57 180 top  (outside the outline)
J14  4P-2.0  [HW4-2.0]  104.39,115.57 180 top  (outside the outline)
J15  4P-2.0  [HW4-2.0]  117.86,116.59 180 top  (outside the outline)
J16  4P-2.0  [HW4-2.0]  166.62,12.19 270 top  (outside the outline)
J17  4P-2.0  [HW4-2.0]  24.64,102.62 180 top  (outside the outline)
J18  4P-2.0  [HW4-2.0]  41.66,113.79 180 top  (outside the outline)
J19  4P-2.0  [HW4-2.0]  29.46,113.79 180 top  (outside the outline)
J20  4P-2.0  [HW4-2.0]  10.41,13.97 90 top
J21  4P-2.0  [HW4-2.0]  8.13,5.08 0 top
J22  4P-2.0  [HW4-2.0]  3.56,13.97 90 top
J23  4P-2.0  [HW4-2.0]  19.05,5.08 0 top
J24  4P-2.0  [HW4-2.0]  28.7,6.1 270 top
J25  4P-2.0-90D  [HW4-2.0-90D]  217.88,218.69 270 bottom  (outside the outline)
J26  4P-2.0  [HW4-2.0]  35.56,6.1 270 top
J27  4P-2.0-90D  [HW4-2.0-90D]  217.63,194.31 270 bottom  (outside the outline)
J28  PJ-066A  [CUI_PJ-066A]  41.66,158.5 90 bottom  (outside the outline)
J29  4P-2.0-90D  [HW4-2.0-90D]  236.93,194.31 270 bottom  (outside the outline)
J31  4P-2.0-90D  [HW4-2.0-90D]  14.27,205.49 90 bottom  (outside the outline)
J32  AUDIO_JACK_TRS_0.25"_PTH_RA  [AUDIO_JACK_0.25"_TRS_PTH_RA]  261.87,80.01 270 top  (outside the outline)
J33  4P-2.0-90D  [HW4-2.0-90D]  254.3,180.34 90 bottom  (outside the outline)
J34  4P-2.0  [HW4-2.0]  14.48,143 0 top  (outside the outline)
J35  4P-2.0-90D  [HW4-2.0-90D]  224.54,173.43 180 bottom  (outside the outline)
J36  4P-2.0  [HW4-2.0]  100.84,104.14 0 top  (outside the outline)
J37  4P-2.0-90D  [HW4-2.0-90D]  254.46,218.95 270 bottom  (outside the outline)
J38  4P-2.0  [HW4-2.0]  246.89,55.88 180 top  (outside the outline)
J39  4P-2.0-90D  [HW4-2.0-90D]  263.35,11.43 270 bottom  (outside the outline)
J41  4P-2.0-90D  [HW4-2.0-90D]  254,40.08 180 bottom  (outside the outline)
J42  J-20-100-2X10_M  [DIL-100-2X10_M]  246.89,13.46 270 bottom  (outside the outline)
JP1  PINHD-1X4  [1X04]  98.04,36.32 0 top  (outside the outline)
JP2  PINHD-1X4  [1X04]  214.63,44.45 180 top  (outside the outline)
JP3  PINHD-2X4  [2X04]  81.79,60.96 90 top  (outside the outline)
JP4  PINHD-2X4  [2X04]  162.81,61.21 90 top  (outside the outline)
JP5  PINHD-2X4  [2X04]  199.39,122.94 90 top  (outside the outline)
JP6  PINHD-2X10  [2X10]  147.83,60.96 90 top  (outside the outline)
JP7  PINHD-2X10  [2X10]  228.85,61.21 90 top  (outside the outline)
JP8  PINHD-2X10  [2X10]  265.43,122.94 90 top  (outside the outline)
JP9  [2X15]  123.67,39.32 0 top  (outside the outline)
JP10  [2X15]  204.67,39.6 0 top  (outside the outline)
JP11  [2X15]  241.22,101.32 0 top  (outside the outline)
JP12  PINHD-1X2  [1X02]  76.2,12.45 90 top  (outside the outline)
JP13  PINHD-1X2  [1X02]  87.63,12.45 90 top  (outside the outline)
JP14  PINHD-1X2  [1X02]  90.68,103.12 0 top  (outside the outline)
JP15  PINHD-1X4  [1X04]  252.48,106.93 180 top  (outside the outline)
JP17  PINHD-1X2  [1X02]  134.62,12.45 90 top  (outside the outline)
JP18  PINHD-1X2  [1X02]  99.06,12.45 90 top  (outside the outline)
JP19  PINHD-1X8  [1X08]  60.71,160.53 0 bottom  (outside the outline)
JP20  PINHD-1X2  [1X02]  23.88,143.26 90 top  (outside the outline)
JP21  PINHD-1X4  [1X04]  54.04,216.41 0 top  (outside the outline)
LED1  RED  [CHIP-LED0603]  24.89,98.81 270 top  (outside the outline)
LED2  GREEN  [CHIP-LED0603]  36.83,103.89 90 top  (outside the outline)
LED3  RED  [CHIP-LED0603]  228.6,24.89 270 top  (outside the outline)
LED4  RED  [CHIP-LED0603]  97.03,120.14 90 top  (outside the outline)
LED5  GREEN  [P-LCC-2]  81.03,194.56 90 top  (outside the outline)
LED6  RED  [P-LCC-2]  120.65,192.28 0 top  (outside the outline)
LED7  GREEN  [P-LCC-2]  124.46,203.2 0 top  (outside the outline)
LED8  AMBER  [P-LCC-2]  139.45,196.85 90 top  (outside the outline)
LED9  AMBER  [P-LCC-2]  155.7,204.72 90 top  (outside the outline)
LED10  AMBER  [P-LCC-2]  174.24,209.8 90 top  (outside the outline)
LED11  AMBER  [P-LCC-2]  194.56,208.53 90 top  (outside the outline)
LED12  RED  [P-LCC-2]  60.71,224.03 0 top  (outside the outline)
OPT1_A  PINHD-1X1  [1X01']  9.14,44.7 0 top  (outside the outline)
OPT1_B  PINHD-1X1  [1X01']  13.97,60.45 0 top  (outside the outline)
OPT2_A  PINHD-1X1  [1X01']  9.14,47.24 0 top  (outside the outline)
OPT2_B  PINHD-1X1  [1X01']  3.81,59.44 0 top  (outside the outline)
OPT3_A  PINHD-1X1  [1X01']  13.46,52.07 0 top  (outside the outline)
OPT3_B  PINHD-1X1  [1X01']  25.65,60.96 0 top  (outside the outline)
OPT4_A  PINHD-1X1  [1X01']  16,52.07 0 top  (outside the outline)
OPT4_B  PINHD-1X1  [1X01']  13.97,57.91 0 top  (outside the outline)
OPT5_A  PINHD-1X1  [1X01']  24.38,51.82 0 top  (outside the outline)
OPT5_B  PINHD-1X1  [1X01']  36.32,59.18 0 top  (outside the outline)
OPT6_A  PINHD-1X1  [1X01']  26.92,51.82 0 top  (outside the outline)
OPT6_B  PINHD-1X1  [1X01']  27.94,59.69 0 top  (outside the outline)
OPT7_A  PINHD-1X1  [1X01']  41.66,45.47 0 top  (outside the outline)
OPT7_B  PINHD-1X1  [1X01']  47.24,59.44 0 top  (outside the outline)
OPT8_A  PINHD-1X1  [1X01']  44.2,45.47 0 top  (outside the outline)
OPT8_B  PINHD-1X1  [1X01']  39.12,62.23 0 top  (outside the outline)
OPT9_A  PINHD-1X1  [1X01']  48.77,45.47 0 top  (outside the outline)
OPT9_B  PINHD-1X1  [1X01']  59.69,64.26 0 top  (outside the outline)
OPT10_A  PINHD-1X1  [1X01']  51.31,45.47 0 top  (outside the outline)
OPT10_B  PINHD-1X1  [1X01']  51.82,66.04 0 top  (outside the outline)
OPT11_A  PINHD-1X1  [1X01']  56.9,45.47 0 top  (outside the outline)
OPT11_B  PINHD-1X1  [1X01']  70.87,69.09 0 top  (outside the outline)
OPT12_A  PINHD-1X1  [1X01']  59.69,45.47 0 top  (outside the outline)
OPT12_B  PINHD-1X1  [1X01']  62.74,69.34 0 top  (outside the outline)
OPT_PWR  [1X01]  105.41,166.12 0 top  (outside the outline)
P1  P-10-100-2X05_M  [DIL-100-2X05_M]  77.72,141.73 180 bottom  (outside the outline)
P2  P-24-100-2X12_M  [DIL-100-2X12_M]  124.77,150.78 180 bottom  (outside the outline)
P3  M-1X03-SIP-100-40Y  [SIP-100-03-40Y]  16.51,119.89 90 top  (outside the outline)
P4  M-1X03-SIP-100-40Y  [SIP-100-03-40Y]  16.76,131.83 90 top  (outside the outline)
P5_2  [1X01]  206.5,17.02 180 top  (outside the outline)
P5_3  [1X01]  203.96,17.02 180 top  (outside the outline)
P6-7  [1X01]  98.3,132.08 0 top  (outside the outline)
P12-4  [1X01]  97.54,139.95 0 top  (outside the outline)
P20  [1X01]  104.9,142.49 0 top  (outside the outline)
P64  [1X01]  95.5,136.91 0 top  (outside the outline)
P65  [1X01]  95.5,134.37 0 top  (outside the outline)
P66  [1X01]  95.76,130.05 0 top  (outside the outline)
PA0  PINHD-1X1  [1X01']  13.97,62.99 0 top  (outside the outline)
PA1  PINHD-1X1  [1X01']  4.06,65.02 0 top  (outside the outline)
PA2  PINHD-1X1  [1X01']  25.65,63.5 0 top  (outside the outline)
PA3  PINHD-1X1  [1X01']  13.97,65.53 0 top  (outside the outline)
PA4  PINHD-1X1  [1X01']  36.07,64.77 0 top  (outside the outline)
PA5  PINHD-1X1  [1X01']  27.94,65.79 0 top  (outside the outline)
PA6  PINHD-1X1  [1X01']  47.24,65.02 0 top  (outside the outline)
PA7  PINHD-1X1  [1X01']  37.59,68.33 0 top  (outside the outline)
PB0  PINHD-1X1  [1X01']  59.18,73.41 0 top  (outside the outline)
PB1  PINHD-1X1  [1X01']  61.47,71.88 0 top  (outside the outline)
PB8  PINHD-1X1  [1X01']  30.73,101.09 0 top  (outside the outline)
PB9  PINHD-1X1  [1X01']  29.46,97.79 0 top  (outside the outline)
PC4  PINHD-1X1  [1X01']  59.18,70.1 0 top  (outside the outline)
PC5  PINHD-1X1  [1X01']  51.82,68.58 0 top  (outside the outline)
PD0  PINHD-1X1  [1X01']  70.1,98.04 0 top  (outside the outline)
PD1  PINHD-1X1  [1X01']  33.78,104.39 0 top  (outside the outline)
PD8  PINHD-1X1  [1X01']  54.86,81.28 0 top  (outside the outline)
PD9  PINHD-1X1  [1X01']  57.4,85.34 0 top  (outside the outline)
PD10  PINHD-1X1  [1X01']  64.77,85.6 0 top  (outside the outline)
PD15  PINHD-1X1  [1X01']  67.56,98.04 0 top  (outside the outline)
PGO1  [1X01]  215.6,225.04 0 top  (outside the outline)
PGO3  [1X01]  234.14,225.3 0 top  (outside the outline)
PGO5  [1X01]  215.34,200.66 0 top  (outside the outline)
PGO7  [1X01]  234.65,200.66 0 top  (outside the outline)
PGO9  [1X01]  16.56,199.14 180 top  (outside the outline)
PGO11  [1X01]  256.59,173.99 180 top  (outside the outline)
PGO13  [1X01]  218.19,171.15 90 top  (outside the outline)
PGO15  [1X01]  252.17,225.3 0 top  (outside the outline)
PGO17  [1X01]  261.06,17.78 0 top  (outside the outline)
PGO19  [1X01]  247.65,37.8 90 top  (outside the outline)
Q1  25MHz  [NX3225]  26.16,85.34 180 top  (outside the outline)
R1  10k  [RESC1608X60]  201.68,175.77 90 top  (outside the outline)
R2  100R  [RESC1608X60]  194.82,172.21 270 top  (outside the outline)
R3  10k  [RESC1608X60]  193.04,175.77 90 top  (outside the outline)
R4  47R  [R0603]  27.18,77.98 180 top  (outside the outline)
R5  10k  [R0603]  35.38,101.12 90 top  (outside the outline)
R6  100R  [RESC1608X60]  185.93,172.21 270 top  (outside the outline)
R7  10k  [RESC1608X60]  184.91,175.77 90 top  (outside the outline)
R8  100R  [RESC1608X60]  177.55,172.21 270 top  (outside the outline)
R9  560R  [R0603]  198.12,113.28 90 top  (outside the outline)
R10  560R  [R0603]  90.42,98.04 90 top  (outside the outline)
R11  47k  [R0603]  93.73,97.54 180 top  (outside the outline)
R12  10k  [RESC1608X60]  176.28,175.77 90 top  (outside the outline)
R13  560R  [R0603]  155.96,57.4 0 top  (outside the outline)
R14  0R_DNP  [R0603]  121.41,89.66 270 top  (outside the outline)
R15  0R_DNP  [R0603]  124.21,89.66 270 top  (outside the outline)
R16  100R  [RESC1608X60]  168.15,172.21 270 top  (outside the outline)
R17  10k  [RESC1608X60]  167.39,176.02 90 top  (outside the outline)
R18  100R  [RESC1608X60]  159.51,171.96 270 top  (outside the outline)
R19  10k  [RESC1608X60]  158.75,175.77 90 top  (outside the outline)
R20  100R  [RESC1608X60]  150.88,171.7 270 top  (outside the outline)
R21  10k  [RESC1608X60]  150.11,175.77 90 top  (outside the outline)
R22  100R  [RESC1608X60]  142.24,171.7 270 top  (outside the outline)
R23  10k  [RESC1608X60]  106.17,175.51 90 top  (outside the outline)
R24  100R  [RESC1608X60]  100.58,169.67 270 top  (outside the outline)
R25  10k  [RESC1608X60]  141.22,175.51 90 top  (outside the outline)
R26  100R  [RESC1608X60]  133.1,172.21 270 top  (outside the outline)
R27  10k  [RESC1608X60]  132.59,175.51 90 top  (outside the outline)
R28  100R  [RESC1608X60]  124.46,172.21 270 top  (outside the outline)
R29  10k  [RESC1608X60]  123.7,175.77 90 top  (outside the outline)
R30  100R  [RESC1608X60]  116.59,173.23 270 top  (outside the outline)
R31  10k  [RESC1608X60]  114.81,175.51 90 top  (outside the outline)
R32  100R  [RESC1608X60]  106.93,172.21 270 top  (outside the outline)
R33  20k  [R0603]  7.37,51.31 180 top  (outside the outline)
R34  20k  [R0603]  6.1,56.64 90 top  (outside the outline)
R35  820R  [R0603]  8.38,53.34 180 top  (outside the outline)
R36  820R  [R0603]  11.18,55.12 90 top  (outside the outline)
R37  0R  [R0603]  11.68,61.98 270 top  (outside the outline)
R38  20k  [R0603]  9.4,67.06 270 top  (outside the outline)
R39  20k  [R0603]  9.91,71.12 0 top  (outside the outline)
R40  820R  [R0603]  11.68,67.06 270 top  (outside the outline)
R41  820R  [R0603]  6.1,69.6 0 top  (outside the outline)
R42  0R  [R0603]  4.32,62.23 270 top  (outside the outline)
R43  100k  [R0603]  5.59,81.53 90 top  (outside the outline)
R44  100k  [R0603]  5.59,77.98 90 top  (outside the outline)
R45  20k  [R0603]  15.24,55.12 0 top  (outside the outline)
R46  20k  [R0603]  21.08,52.83 180 top  (outside the outline)
R47  820R  [R0603]  16.51,57.91 90 top  (outside the outline)
R48  820R  [R0603]  22.86,57.4 270 top  (outside the outline)
R49  0R  [R0603]  23.37,61.98 270 top  (outside the outline)
R50  20k  [R0603]  17.53,69.34 0 top  (outside the outline)
R51  20k  [R0603]  21.59,70.36 180 top  (outside the outline)
R52  820R  [R0603]  22.1,67.31 270 top  (outside the outline)
R53  820R  [R0603]  24.64,66.55 270 top  (outside the outline)
R54  0R  [R0603]  16.26,61.98 270 top  (outside the outline)
R55  20k  [R0603]  28.96,56.9 90 top  (outside the outline)
R56  20k  [R0603]  33.78,56.64 90 top  (outside the outline)
R57  820R  [R0603]  26.42,57.15 90 top  (outside the outline)
R58  820R  [R0603]  30.48,52.83 0 top  (outside the outline)
R59  0R  [R0603]  35.56,61.98 270 top  (outside the outline)
R60  20k  [R0603]  36.32,53.85 0 top  (outside the outline)
R61  20k  [R0603]  33.78,67.56 270 top  (outside the outline)
R62  33R  [R0201]  27.94,96.27 0 top  (outside the outline)
R63  820R  [R0603]  31.5,70.61 0 top  (outside the outline)
R64  820R  [R0603]  28.96,68.33 90 top  (outside the outline)
R65  0R  [R0603]  28.19,62.74 270 top  (outside the outline)
R66  20k  [R0603]  42.16,52.58 0 top  (outside the outline)
R67  20k  [R0603]  41.4,55.63 90 top  (outside the outline)
R68  820R  [R0603]  46.99,55.12 180 top  (outside the outline)
R69  820R  [R0603]  46.74,57.15 0 top  (outside the outline)
R70  0R  [R0603]  46.48,62.23 270 top  (outside the outline)
R71  20k  [R0603]  48.26,53.09 0 top  (outside the outline)
R72  20k  [R0603]  44.7,67.82 270 top  (outside the outline)
R73  820R  [R0603]  46.99,67.82 270 top  (outside the outline)
R74  820R  [R0603]  41.15,67.56 90 top  (outside the outline)
R75  0R  [R0603]  38.86,65.02 270 top  (outside the outline)
R76  20k  [R0603]  51.82,50.04 0 top  (outside the outline)
R77  20k  [R0603]  57.66,53.09 180 top  (outside the outline)
R78  820R  [R0603]  52.32,56.9 90 top  (outside the outline)
R79  560R  [R0603]  37.59,101.09 90 top  (outside the outline)
R80  820R  [R0603]  52.32,53.59 90 top  (outside the outline)
R81  33R  [R0201]  27.94,94.23 0 top  (outside the outline)
R82  0R  [R0603]  24.38,95 180 top  (outside the outline)
R83  33R  [R0201]  27.94,95.25 0 top  (outside the outline)
R84  33R  [R0201]  27.94,93.22 0 top  (outside the outline)
R85  0R  [R0603]  59.69,67.06 270 top  (outside the outline)
R86  0R_DNP  [R0603]  24.38,92.96 180 top  (outside the outline)
R87  0R_DNP  [R0603]  24.38,97.03 180 top  (outside the outline)
R88  20k  [R0603]  56.9,50.29 0 top  (outside the outline)
R89  20k  [R0603]  57.4,67.56 270 top  (outside the outline)
R90  820R  [R0603]  51.31,61.21 0 top  (outside the outline)
R91  820R  [R0603]  49.53,65.02 270 top  (outside the outline)
R92  0R  [R0603]  53.85,67.31 270 top  (outside the outline)
R93  20k  [R0603]  62.48,54.36 0 top  (outside the outline)
R94  20k  [R0603]  65.53,56.9 90 top  (outside the outline)
R95  820R  [R0603]  65.53,53.09 90 top  (outside the outline)
R96  820R  [R0603]  68.58,52.07 0 top  (outside the outline)
R97  0R  [R0603]  70.87,71.88 270 top  (outside the outline)
R98  20k  [R0603]  66.55,49.02 0 top  (outside the outline)
R99  20k  [R0603]  61.98,61.72 270 top  (outside the outline)
R100  820R  [R0603]  69.02,67.75 270 top  (outside the outline)
R101  820R  [R0603]  65.53,67.82 90 top  (outside the outline)
R102  0R  [R0603]  64.26,73.41 0 top  (outside the outline)
R103  0R  [R0603]  15.24,88.14 270 top  (outside the outline)
R104  560R  [R0603]  20.83,98.81 0 top  (outside the outline)
R105  33R  [0402]  40.64,103.38 90 top  (outside the outline)
R106  33R  [0402]  41.91,103.38 90 top  (outside the outline)
R107  33R  [0402]  44.45,102.62 270 top  (outside the outline)
R108  0R_DNP  [R0603]  25.65,90.93 180 top  (outside the outline)
R109  33R  [0402]  43.18,102.62 90 top  (outside the outline)
R110  0R  [R0603]  119.13,89.66 270 top  (outside the outline)
R111  0R  [R0603]  126.49,89.66 270 top  (outside the outline)
R112  33R  [R0201]  182.88,87.63 180 top  (outside the outline)
R113  10k  [R0603]  234.95,4.83 270 top  (outside the outline)
R114  10k  [R0603]  238.76,8.13 270 top  (outside the outline)
R115  10k  [R0603]  219.46,4.83 0 top  (outside the outline)
R116  0R  [R0603]  200.41,12.45 180 top  (outside the outline)
R117  33R  [R0201]  219.71,24.89 0 top  (outside the outline)
R118  33R  [R0201]  219.71,23.88 0 top  (outside the outline)
R119  33R  [R0201]  216.92,19.81 0 top  (outside the outline)
R120  10k  [R0603]  219.71,2.54 180 top  (outside the outline)
R121  33R  [R0201]  216.92,18.8 0 top  (outside the outline)
R122  33R  [R0201]  216.92,18.14 0 top  (outside the outline)
R123  560R  [R0603]  225.81,24.89 0 top  (outside the outline)
R124  33R  [R0201]  217.04,16.89 0 top  (outside the outline)
R125  1k  [R0603]  19.84,18.29 180 top
R126  2k  [R0603]  218.64,226.31 0 top  (outside the outline)
R127  2k  [R0603]  218.64,223.52 180 top  (outside the outline)
R128  10k  [R0603]  87.12,188.72 270 top  (outside the outline)
R129  560R  [R0603]  121.16,186.44 0 top  (outside the outline)
R130  0R  [R0603]  62.93,138.61 90 top  (outside the outline)
R131  2k  [R0603]  219.66,220.98 270 top  (outside the outline)
R132  0R_DNP  [R0603]  212.8,225.04 180 top  (outside the outline)
R133  0R  [R0603]  10.16,22.61 0 top
R134  1k  [R0603]  15.24,18.29 0 top
R135  10k  [R0603]  128.27,199.39 270 top  (outside the outline)
R136  560R  [R0603]  142.75,200.66 0 top  (outside the outline)
R137  560R  [R0603]  159,208.79 0 top  (outside the outline)
R138  560R  [R0603]  100.08,120.14 180 top  (outside the outline)
R139  560R  [R0603]  177.8,213.36 0 top  (outside the outline)
R140  560R  [R0603]  197.1,212.6 90 top  (outside the outline)
R141  560R  [R0603]  56.55,219.12 180 top  (outside the outline)
R142  1.5k  [R0603]  141.73,149.1 0 top  (outside the outline)
R143  0R  [R0603]  75.95,217.42 0 top  (outside the outline)
R144  0R  [R0603]  75.95,212.34 0 top  (outside the outline)
R145  0R_DNP  [R0603]  75.95,209.55 180 top  (outside the outline)
R146  0R_DNP  [R0603]  75.95,214.88 180 top  (outside the outline)
R147  1.5k  [R0603]  141.73,151.89 0 top  (outside the outline)
R148  1.5k  [R0603]  85.34,147.57 180 top  (outside the outline)
R149  1.5k  [R0603]  84.84,150.62 270 top  (outside the outline)
R150  1.5k  [R0603]  30.73,18.54 180 top
R151  1.5k  [R0603]  39.12,9.65 270 top
R152  1.5k  [R0603]  86.61,156.46 90 top  (outside the outline)
R153  1.5k  [R0603]  88.9,153.16 0 top  (outside the outline)
R154  1.5k  [R0603]  75.44,156.21 180 top  (outside the outline)
R155  1.5k  [R0603]  74.68,158.75 180 top  (outside the outline)
R156  1.5k  [R0603]  54.36,156.21 90 top  (outside the outline)
R157  1.5k  [R0603]  54.36,152.65 90 top  (outside the outline)
R158  1k  [R0603]  145.54,129.29 270 top  (outside the outline)
R159  1k  [R0603]  104.65,96.01 0 top  (outside the outline)
R160  1k  [R0603]  104.14,98.55 270 top  (outside the outline)
R161  1k  [R0603]  106.17,98.55 270 top  (outside the outline)
R162  1k  [R0603]  108.2,98.55 270 top  (outside the outline)
R163  2k  [R0603]  237.19,226.57 0 top  (outside the outline)
R164  2k  [R0603]  237.19,223.77 180 top  (outside the outline)
R165  2k  [R0603]  238.2,221.23 270 top  (outside the outline)
R166  0R_DNP  [R0603]  231.34,225.3 180 top  (outside the outline)
R167  1k  [R0603]  98.81,98.3 270 top  (outside the outline)
R168  1k  [R0603]  96.77,98.3 270 top  (outside the outline)
R169  1k  [R0603]  98.3,95.76 180 top  (outside the outline)
R170  1k  [R0603]  103.63,84.07 90 top  (outside the outline)
R171  2k  [R0603]  218.39,201.93 0 top  (outside the outline)
R172  2k  [R0603]  218.39,199.14 180 top  (outside the outline)
R173  2k  [R0603]  219.41,196.6 270 top  (outside the outline)
R174  0R_DNP  [R0603]  212.55,200.66 180 top  (outside the outline)
R175  1k  [R0603]  105.92,84.07 90 top  (outside the outline)
R176  1k  [R0603]  105.16,86.87 0 top  (outside the outline)
R177  1k  [R0603]  99.82,84.07 90 top  (outside the outline)
R178  1k  [R0603]  97.54,84.07 90 top  (outside the outline)
R179  2k  [R0603]  237.69,201.93 0 top  (outside the outline)
R180  2k  [R0603]  237.69,199.14 180 top  (outside the outline)
R181  2k  [R0603]  238.71,196.6 270 top  (outside the outline)
R182  0R_DNP  [R0603]  231.85,200.66 180 top  (outside the outline)
R183  1k  [R0603]  98.81,86.87 180 top  (outside the outline)
R184  560R  [R0603]  80.52,51.56 90 top  (outside the outline)
R185  0R  [R0603]  119.63,84.07 180 top  (outside the outline)
R186  2k  [R0603]  249.38,65.23 270 top  (outside the outline)
R187  2k  [R0603]  19.35,196.85 180 top  (outside the outline)
R188  2k  [R0603]  13.51,200.66 0 top  (outside the outline)
R189  2k  [R0603]  12.5,203.2 90 top  (outside the outline)
R190  0R_DNP  [R0603]  19.35,199.14 0 top  (outside the outline)
R191  2k  [R0603]  248.97,61.61 180 top  (outside the outline)
R192  10k  [R0603]  245.62,73.66 270 top  (outside the outline)
R193  10k  [R0603]  245.62,69.85 90 top  (outside the outline)
R194  10k  [R0603]  250.19,73.66 90 top  (outside the outline)
R195  2k  [R0603]  259.38,171.45 180 top  (outside the outline)
R196  2k  [R0603]  253.54,175.51 0 top  (outside the outline)
R197  2k  [R0603]  252.53,178.05 90 top  (outside the outline)
R198  0R_DNP  [R0603]  259.38,173.99 0 top  (outside the outline)
R199  10k  [R0603]  246.13,76.45 0 top  (outside the outline)
R200  33R  [R0201]  123.95,121.41 180 top  (outside the outline)
R201  33R  [R0201]  114.3,120.65 180 top  (outside the outline)
R202  33R  [R0201]  48.51,99.82 270 top  (outside the outline)
R203  2k  [R0603]  215.9,168.35 90 top  (outside the outline)
R204  2k  [R0603]  219.71,174.19 270 top  (outside the outline)
R205  2k  [R0603]  222.25,175.21 0 top  (outside the outline)
R206  0R_DNP  [R0603]  218.19,168.35 270 top  (outside the outline)
R207  33R  [R0201]  114.3,119.89 180 top  (outside the outline)
R208  33R  [R0201]  185.67,86.87 90 top  (outside the outline)
R209  33R  [R0201]  197.1,82.04 90 top  (outside the outline)
R210  1.5k  [R0603]  133.35,128.02 90 top  (outside the outline)
R211  2k  [R0603]  255.22,226.57 0 top  (outside the outline)
R212  2k  [R0603]  255.22,223.77 180 top  (outside the outline)
R213  2k  [R0603]  256.24,221.23 270 top  (outside the outline)
R214  0R_DNP  [R0603]  249.38,225.3 180 top  (outside the outline)
R215  1.5k  [R0603]  125.48,130.3 90 top  (outside the outline)
R219  2k  [R0603]  258.27,20.07 0 top  (outside the outline)
R220  2k  [R0603]  264.11,16.26 180 top  (outside the outline)
R221  2k  [R0603]  265.13,13.72 270 top  (outside the outline)
R222  0R_DNP  [R0603]  258.27,17.78 180 top  (outside the outline)
R227  2k  [R0603]  245.62,35 90 top  (outside the outline)
R228  2k  [R0603]  249.17,40.84 270 top  (outside the outline)
R229  2k  [R0603]  251.71,41.86 0 top  (outside the outline)
R230  0R_DNP  [R0603]  247.65,35 270 top  (outside the outline)
S1  MOMENTARY-SWITCH-SPST-PTH-6.0MM  [TACTILE_SWITCH_PTH_6.0MM]  139.45,189.74 0 top  (outside the outline)
S2  MOMENTARY-SWITCH-SPST-PTH-6.0MM  [TACTILE_SWITCH_PTH_6.0MM]  155.7,197.87 0 top  (outside the outline)
S3  MOMENTARY-SWITCH-SPST-PTH-6.0MM  [TACTILE_SWITCH_PTH_6.0MM]  174.24,202.69 0 top  (outside the outline)
S4  MOMENTARY-SWITCH-SPST-PTH-6.0MM  [TACTILE_SWITCH_PTH_6.0MM]  194.56,201.93 0 top  (outside the outline)
S5  MOMENTARY-SWITCH-SPST-PTH-6.0MM  [TACTILE_SWITCH_PTH_6.0MM]  88.9,215.39 0 top  (outside the outline)
S6  MOMENTARY-SWITCH-SPST-PTH-6.0MM  [TACTILE_SWITCH_PTH_6.0MM]  88.9,200.41 0 top  (outside the outline)
S7  MOMENTARY-SWITCH-SPST-PTH-6.0MM  [TACTILE_SWITCH_PTH_6.0MM]  94.49,207.77 0 top  (outside the outline)
S8  MOMENTARY-SWITCH-SPST-PTH-6.0MM  [TACTILE_SWITCH_PTH_6.0MM]  83.57,207.77 0 top  (outside the outline)
S9  MOMENTARY-SWITCH-SPST-PTH-6.0MM  [TACTILE_SWITCH_PTH_6.0MM]  81.03,188.47 0 top  (outside the outline)
S10  MOMENTARY-SWITCH-SPST-PTH-6.0MM  [TACTILE_SWITCH_PTH_6.0MM]  113.54,192.02 0 top  (outside the outline)
S11  MOMENTARY-SWITCH-SPST-PTH-6.0MM  [TACTILE_SWITCH_PTH_6.0MM]  117.35,203.2 0 top  (outside the outline)
S12  MOMENTARY-SWITCH-SPST-PTH-6.0MM  [TACTILE_SWITCH_PTH_6.0MM]  52.83,224.03 0 top  (outside the outline)
SC7  [1X01]  128.52,131.83 0 top  (outside the outline)
SD7  [1X01]  128.52,134.37 0 top  (outside the outline)
SW1  PEC11R-4215F-S0024  [PEC11R-4215F-S0024]  109.47,222.76 0 top  (outside the outline)
U1  CY8C5868AXI-LP035  [TQFP-100-14X14MM]  226.82,14.99 270 top  (outside the outline)
U2  CY8C5868AXI-LP035  [TQFP-100-14X14MM]  108.71,132.08 0 top  (outside the outline)
U3  [QRE1113]  198.37,173.99 0 top  (outside the outline)
U4  [QRE1113]  189.74,173.99 0 top  (outside the outline)
U5  [QRE1113]  181.1,173.99 0 top  (outside the outline)
U6  [QRE1113]  172.21,173.99 0 top  (outside the outline)
U7  [QRE1113]  163.58,173.99 0 top  (outside the outline)
U8  [QRE1113]  154.69,173.99 0 top  (outside the outline)
U9  [QRE1113]  146.05,173.99 0 top  (outside the outline)
U10  [QRE1113]  137.16,173.99 0 top  (outside the outline)
U11  [QRE1113]  128.52,173.99 0 top  (outside the outline)
U12  [QRE1113]  119.89,173.99 0 top  (outside the outline)
U13  [QRE1113]  111,173.74 0 top  (outside the outline)
U14  [QRE1113]  102.36,173.74 0 top  (outside the outline)
U15  R-78E5.0-1.0  [DC-DC_CONVERTER_78XX]  44.7,145.54 180 top  (outside the outline)
U16  TEXAS_TPS2051B  [TEXAS_SOT23-5]  110.24,169.42 270 top  (outside the outline)
U17  R-78E5.0-1.0  [DC-DC_CONVERTER_78XX]  162.81,95.5 90 top  (outside the outline)
U19  TCA9548APWR  [SOP65P640X120-24N]  140.21,132.84 180 top  (outside the outline)
U20  TCA9548APWR  [SOP65P640X120-24N]  20.07,12.95 0 top
U22  AS5600  [SOIC8-1.27-5X4MM]  213.82,218.95 0 top  (outside the outline)
U23  AS5600  [SOIC8-1.27-5X4MM]  232.36,219.2 0 top  (outside the outline)
U25  AS5600  [SOIC8-1.27-5X4MM]  213.56,194.56 0 top  (outside the outline)
U27  AS5600  [SOIC8-1.27-5X4MM]  232.87,194.56 0 top  (outside the outline)
U29  AS5600  [SOIC8-1.27-5X4MM]  18.34,205.23 180 top  (outside the outline)
U31  AS5600  [SOIC8-1.27-5X4MM]  258.37,180.09 180 top  (outside the outline)
U33  AS5600  [SOIC8-1.27-5X4MM]  224.28,169.37 90 top  (outside the outline)
U35  AS5600  [SOIC8-1.27-5X4MM]  250.39,219.2 0 top  (outside the outline)
U37  AS5600  [SOIC8-1.27-5X4MM]  259.28,11.68 0 top  (outside the outline)
U39  AS5600  [SOIC8-1.27-5X4MM]  253.75,36.02 90 top  (outside the outline)
U$1  RK09  [RK09]  152.15,222.5 0 top  (outside the outline)
U$2  RK09  [RK09]  189.23,223.01 0 top  (outside the outline)
U$3  CMR0512S3C  [CMR0512S3C]  128.78,100.08 0 top  (outside the outline)
U$5  MCP3221  [SOT23-5L]  244.83,62.89 270 top  (outside the outline)
U$6  SS-7188VS-A-FLS  [SS-7188VS-A-FLS_RJ45]  20.57,28.19 180 bottom
U$9  P82B96DP,118  [SO8]  81.03,154.94 270 top  (outside the outline)
U$10  P82B96DP,118  [SO8]  34.54,14.99 270 top
VREGGND  PINHD-1X1  [1X01']  123.95,92.46 90 top  (outside the outline)
VREGIN  PINHD-1X1  [1X01']  121.41,92.46 90 top  (outside the outline)
X1  3221-10-0300-00  [3221-10-0300-00]  81.28,128.27 270 top  (outside the outline)
X2  3221-10-0300-00  [3221-10-0300-00]  68.58,90.17 90 top  (outside the outline)
X3  3221-10-0300-00  [3221-10-0300-00]  177.8,22.35 180 top  (outside the outline)
X4  GLX-S-88M  [GLX-S-88M]  82.04,167.89 0 bottom  (outside the outline)
X5  2524-  [PAK100/2500-24]  82.55,223.84 0 bottom  (outside the outline)
X6  2520-  [PAK100/2500-20]  96.77,-5.84 0 top  (outside the outline)
X7  2516-  [PAK100/2500-16]  181.61,93.47 0 top  (outside the outline)
X8  2510-  [PAK100/2500-10]  129.59,214.79 0 bottom  (outside the outline)
X9  2516-  [PAK100/2500-16]  138.94,118.11 0 top  (outside the outline)
X10  2516-  [PAK100/2500-16]  120.4,165.35 0 bottom  (outside the outline)
X11  2516-  [PAK100/2500-16]  25.91,46.48 0 top  (outside the outline)

## Library data of the parts
3V3A 3V3A_1 3V3A_2 3V3D 3V3D1 3V3D2 5V 5VD1 5VD2 AGND AGND_1 AGND_2 DGND DGND1-DGND4 HOUT1 HOUT3 HOUT5 HOUT7 HOUT9 HOUT11 HOUT13 HOUT15 HOUT17 HOUT19 OPT_PWR P5_2 P5_3 P6-7 P12-4 P20 P64-P66 PGO1 PGO3 PGO5 PGO7 PGO9 PGO11 PGO13 PGO15 PGO17 PGO19 SC7 SD7 = adafruit; PARTNO: *DNP
3V3A_0A 3V3A_0B 3V3A_0C 5V/1 +12VA +15VA -12VA -15VA DGND5 JP12-JP14 JP17-JP21 OPT1_A OPT1_B OPT2_A OPT2_B OPT3_A OPT3_B OPT4_A OPT4_B OPT5_A OPT5_B OPT6_A OPT6_B OPT7_A OPT7_B OPT8_A OPT8_B OPT9_A OPT9_B OPT10_A OPT10_B OPT11_A OPT11_B OPT12_A OPT12_B PA0 PA1-PA7 PB0 PB1 PB8 PB9 PC4 PC5 PD0 PD1 PD8-PD10 PD15 VREGGND VREGIN = Connector; CATEGORY: CONNECTOR; PARTNO: *DNP; SUB-CATEGORY: PIN-HEADER
C1-C5 C11-C15 C20 C22-C50 C55-C57 C60-C63 C70-C106 C113 C117 C118 C122 = Perfect_0402; PARTNO: CC0402KRX7R8BB104
C6-C10 C51-C54 C58 C59 C66-C69 C116 C119-C121 = rcl; PARTNO: TMK063B7103KP-F; SPICEPREFIX: C
C16 C21 C64 C65 = Perfect_0402; PARTNO: CC0402KRX7R8BB103
C17 C18 = rcl; PARTNO: CL10C180JB8NNNC; SPICEPREFIX: C
C19 C123 C182 = adafruit; PARTNO: T491A225K020AT
C107 C110 C178 C179 = rcl; PARTNO: CC0603KRX7R8BB104; SPICEPREFIX: C
C108 C111 C114 C175 = rcl; PARTNO: C3216X7R1E105K085AA; SPICEPREFIX: C
C109 C112 C115 C174 = rcl; PARTNO: TAJB106K025RNJ; SPICEPREFIX: C
C124 C127 C128 C133 C134 C136 C141-C152 C154 C156 C157 C164-C167 C172 C176 C180 C184 C188 C192 C196 C200 C204 = adafruit; PARTNO: CC0603KRX7R8BB104
C125 C126 C131 C132 C137-C140 C159 C162 C163 C169 C170 C173 C177 C181 C185 C189 C193 C197 C201 C205 = adafruit; PARTNO: C3216X7R1E105K085AA
C129 C130 C135 C153 C160 C161 C168 = rcl; PARTNO: TMK316F106ZL-T
C155 = adafruit; PARTNO: C0603C222J5GACTU
C158 = adafruit; PARTNO: EEE-1CA220NP
C171 = adafruit; PARTNO: ESW227M035AH9AA
D2 D3 = diode; PARTNO: MBRS340T3G
IC1 IC7-IC10 IC17 = linear; PARTNO: OPA4348AQPWRQ1
IC2 = linear; PARTNO: LMV321M5
IC3 = STM32H743ZIT6; AVAILABILITY: Unavailable; DESCRIPTION: High-performance and DSP with DP-FPU, ARM Cortex-M7 MCU with 2MBytes Flash, 1MB RAM, 400 MHz CPU, Art Accelerator, L1...; MF: STMicroelectronics; MP: STM32H743ZIT6; PACKAGE: LQFP-144 STMicroelectronics; PARTNO: STM32H730ZBT6; PRICE: None
IC4 = linear; PARTNO: LMV611MF/NOPB
IC5 = v-reg; PARTNO: LM78L12ACZ/LFT7
IC6 = v-reg; PARTNO: L79L12ACZ-TR
IC11 = custom; PARTNO: LP5912-3.3DRVT
IC12-IC15 IC18 IC20 = custom; PARTNO: LD1117S33TR
IC16 = linear; PARTNO: OPA1654AIPWR
J1 J32 = SparkFun-Connectors; PARTNO: NRJ6HM-1; PROD_ID: CONN-12339; SF_ID: COM-11144
J2-J8 J10-J24 J26 J34 J36 J38 = OPL_Connector; PARTNO: 110990030
J9 J25 J27 J29 J31 J33 J35 J37 J39 J41 = OPL_Connector; PARTNO: 110990037
J28 = PJ-066A; MANUFACTURER: CUI INC; PARTNO: PJ-066A; PARTREV: 1.02; STANDARD: Manufacturer recommendations
J42 = con-headers-jp; PARTNO: RS2-20-G
JP1 JP2 JP15 = Connector; CATEGORY: CONNECTOR; SUB-CATEGORY: PIN-HEADER
JP3-JP5 = Connector; CATEGORY: CONNECTOR; PARTNO: 77313-101-08LF; SUB-CATEGORY: PIN-HEADER
JP6-JP8 = Connector; CATEGORY: CONNECTOR; PARTNO: 77313-101-20LF; SUB-CATEGORY: PIN-HEADER
JP9-JP11 = pinhead; PARTNO: 77313-101-30LF
LED1 LED3 LED4 = adafruit; PARTNO: 5973006507F
LED2 = adafruit; PARTNO: 5973506507F
LED5 LED7 = adafruit; PARTNO: HSMM-A101-R00J1
LED6 LED12 = adafruit; PARTNO: HSMZ-A100-R00J1
LED8-LED11 = adafruit; PARTNO: HSMU-A100-S00J1
P1 = con-headers-jp; PARTNO: ESW-105-12-L-D
P2 = con-headers-jp; PARTNO: ESW-112-12-L-D
P3 P4 = con-headers-jp; PARTNO: *DNP
Q1 = adafruit; PARTNO: 7M-25.000MAAJ-T
R1 R3 R7 R12 R17 R19 R21 R23 R25 R27 R29 R31 = Resistor; CATEGORY: Resistor; PARTNO: ESR03EZPF1002; SUB-CATEGORY: Fixed
R2 R6 R8 R16 R18 R20 R22 R24 R26 R28 R30 R32 = Resistor; CATEGORY: Resistor; PARTNO: ESR03EZPJ101; SUB-CATEGORY: Fixed
R4 = Resistor; PARTNO: ESR03EZPJ470
R5 = Resistor; PARTNO: RC0402FR-0710KL
R9 R10 R13 R79 R104 R123 R128 R129 R135-R141 R184 = Resistor; PARTNO: ESR03EZPF5600
R11 = Resistor; PARTNO: ESR03EZPJ473
R14 R15 R86 R87 R108 R132 R145 R146 R166 R174 R182 R190 R198 R206 R214 R222 R230 = Resistor; PARTNO: *DNP
R33 R34 R38 R39 R45 R46 R50 R51 R55 R56 R60 R61 R66 R67 R71 R72 R76 R77 R88 R89 R93 R94 R98 R99 = Resistor; PARTNO: ESR03EZPF2002
R35 R36 R40 R41 R47 R48 R52 R53 R57 R58 R63 R64 R68 R69 R73 R74 R78 R80 R90 R91 R95 R96 R100 R101 = Resistor; PARTNO: RCS0603820RFKEA
R37 R42 R49 R54 R59 R65 R70 R75 R85 R92 R97 R102 R133 = Resistor; PARTNO: RC0603JR-070RL
R43 R44 = Resistor; PARTNO: ESR03EZPF1003
R62 R81 R83 R84 R112 R117-R119 R121 R122 R124 R200-R202 R207-R209 = rcl; PARTNO: RC0201FR-0733RL; SPICEPREFIX: R
R82 R103 R110 R111 R185 = Resistor; PARTNO: RCS06030000Z0EA
R105-R107 R109 = Perfect_0402; PARTNO: RC0402FR-0733RL
R113-R115 R120 R192-R194 R199 = Resistor; PARTNO: ESR03EZPF1002
R116 R130 R143 R144 = Resistor; PARTNO: CRCW06030000Z0EAHP
R125 R134 R158-R162 R167-R170 R175-R178 R183 = Resistor; PARTNO: ESR03EZPF1001
R126 R127 R131 R163-R165 R171-R173 R179-R181 R186-R189 R191 R195-R197 R203-R205 R211-R213 R219-R221 R227-R229 = Resistor; PARTNO: ERJ-PA3F2001V
R142 R147-R157 R210 R215 = Resistor; PARTNO: ESR03EZPJ152
S1-S12 = SparkFun-Switches; PARTNO: TL1105SPF160Q; PROD_ID: SWCH-08441; SF_SKU: COM-00097
SW1 = Switch; CREATED_BY: PCBLayout.com; DIGIKEY_PART_NUMBER: PEC11R-4215F-S0024-ND; MANUFACTURER: Bourns Inc.; MPN: PEC11R-4215F-S0024; PARTNO: PEC11R-4215F-S0024
U1 = SparkFun-IC-Microcontroller; PARTNO: CY8C5888AXI-LP096; PROD_ID: IC-12190
U2 = SparkFun-IC-Microcontroller; PARTNO: CY8C5468AXI-LP042; PROD_ID: IC-12190
U3-U14 = SparkFun-Sensors; PARTNO: QRE1113GR; PROD_ID: IC-09357; SF_ID: COM-09542
U15 U17 = SparkFun-IC-Power; PARTNO: R-78E5.0-1.0; PROD_ID: COM-13655
U16 = LinkedLibrary52101; PARTNO: TPS2051BDBVRG4
U19 U20 = TCA9548APWR; AVAILABILITY: Good; DESCRIPTION: Low-Voltage 8-Channel I2C Switch With Reset 24-TSSOP -40 to 85; MF: Texas Instruments; MP: TCA9548APWR; PACKAGE: TSSOP-24 Texas Instruments; PARTNO: TCA9548APWR; PRICE: None; PURCHASE-URL: https://pricing.snapeda.com/search/part/TCA9548APWR/?ref=eda
U22 U23 U25 U27 U29 U31 U33 U35 U37 U39 = Sensor; PARTNO: AS5600-ASOM
U$1 U$2 = custom; PARTNO: RK09L1220A1B
U$3 = custom; PARTNO: DPU01M-15
U$5 = custom; PARTNO: MCP3221A7T-E/OT
U$6 = custom; PARTNO: SS-7188VS-A-FLS
U$9 U$10 = custom; PARTNO: P82B96TD*112
X1-X3 = custom; PARTNO: 4048
X4 = con-kycon; OC_FARNELL: unknown; OC_NEWARK: unknown; PARTNO: GLX-S-88M
X5 = con-3m; OC_FARNELL: unknown; OC_NEWARK: unknown; PARTNO: DW-12-08-L-D-215
X6 = con-3m; OC_FARNELL: unknown; OC_NEWARK: unknown; PARTNO: N2520-6003-UG
X7 X9-X11 = con-3m; OC_FARNELL: unknown; OC_NEWARK: unknown; PARTNO: D2516-6002-AR
X8 = con-3m; MF: 3M; MPN: 2510-6002UB; OC_FARNELL: 9838244; OC_NEWARK: 46F4725; PARTNO: DW-05-08-L-D-215